# Altium PCB PCB1.PcbDoc (part 1 of 3)
Units mm, origin at the board's own origin, x right, y up, seen from the top; angles counter-clockwise.
Board outline 52.5 x 44.25 mm, 6 copper layers (Top Layer, Int1 (GND), Int2 (Sign), Int3 (Sign), Int4 (PWR), Bottom Layer), stack 1.551 mm thick; 69 components, 80 nets, 350 pads, 96 vias.
Unrouted connection lines stored in the file: 150.
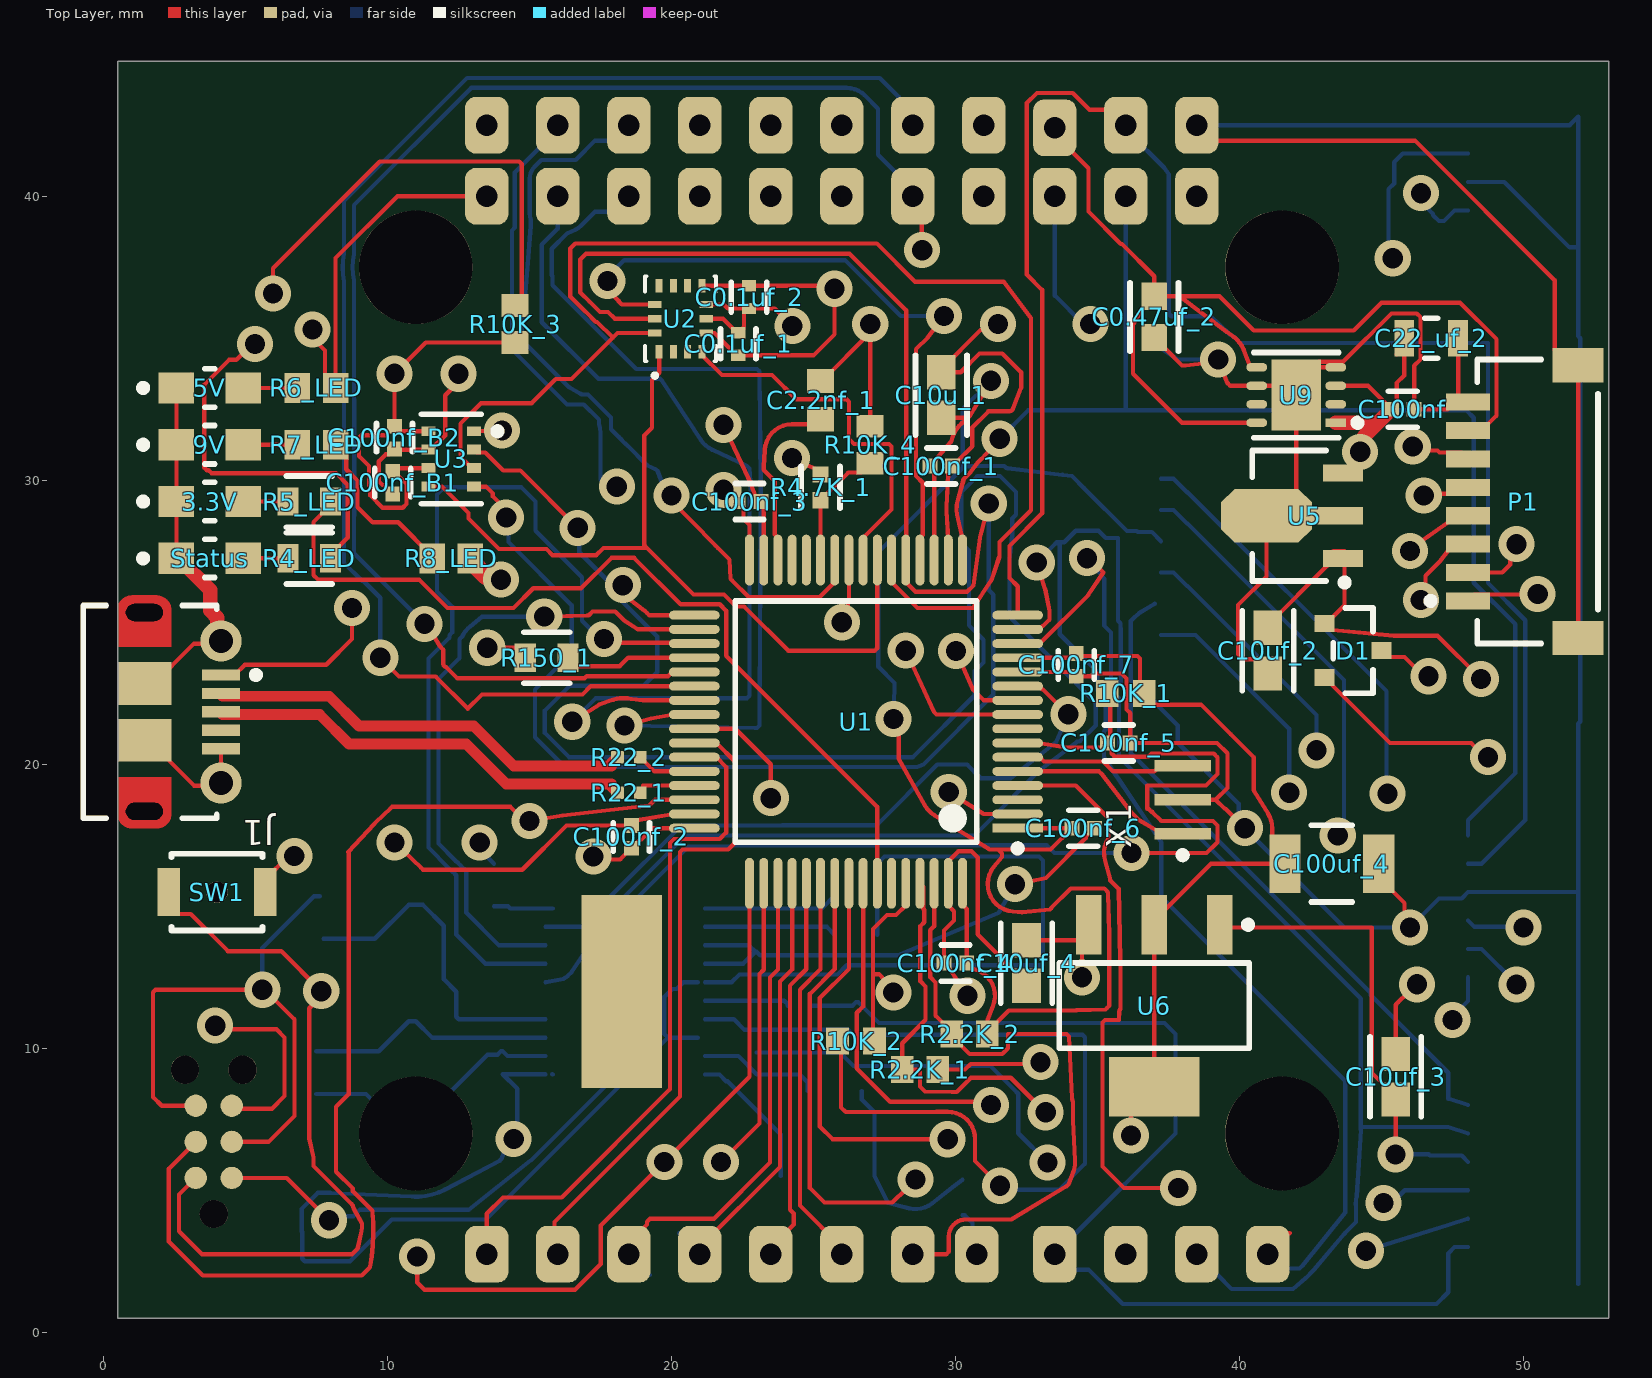
[diagram p0: Top Layer view]
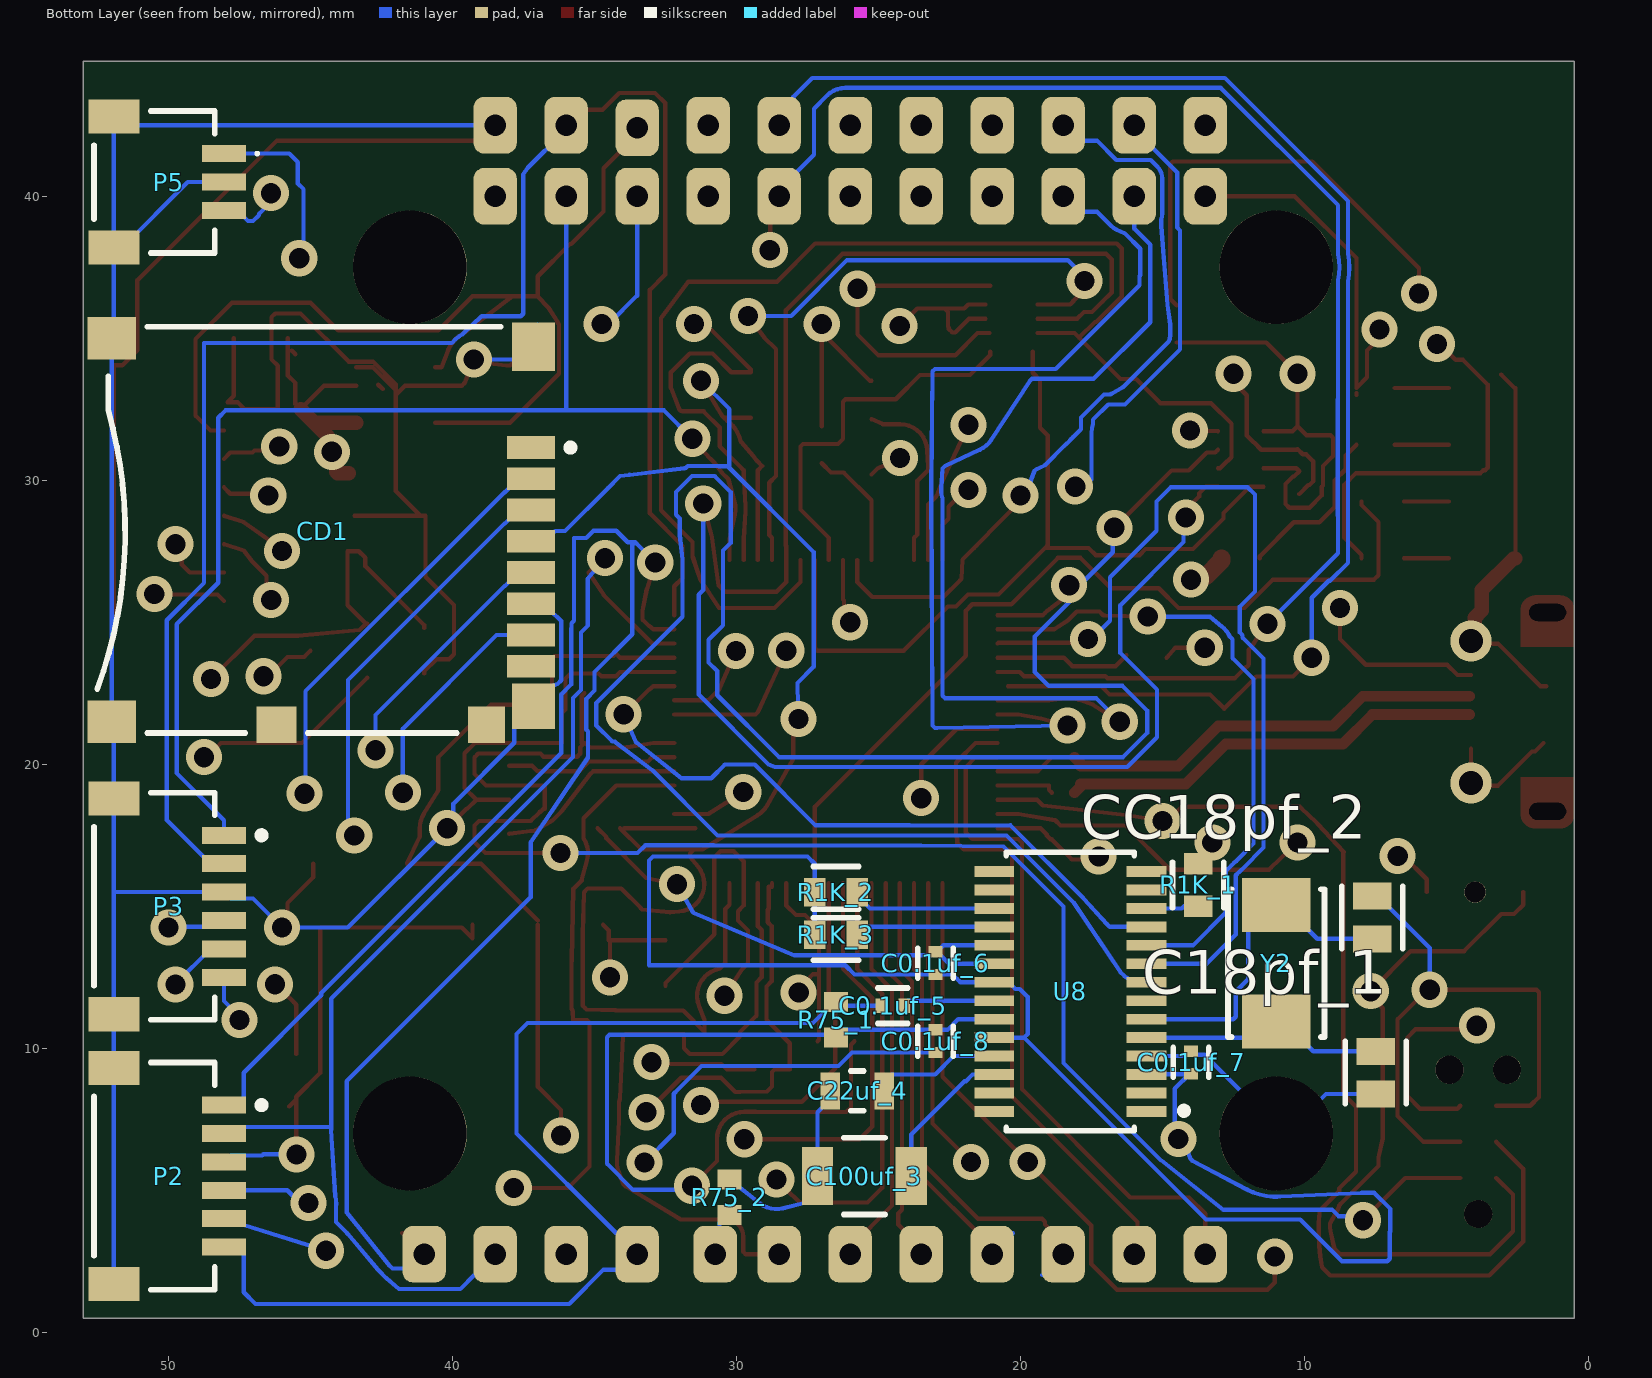
[diagram p1: Bottom Layer view, seen from below]
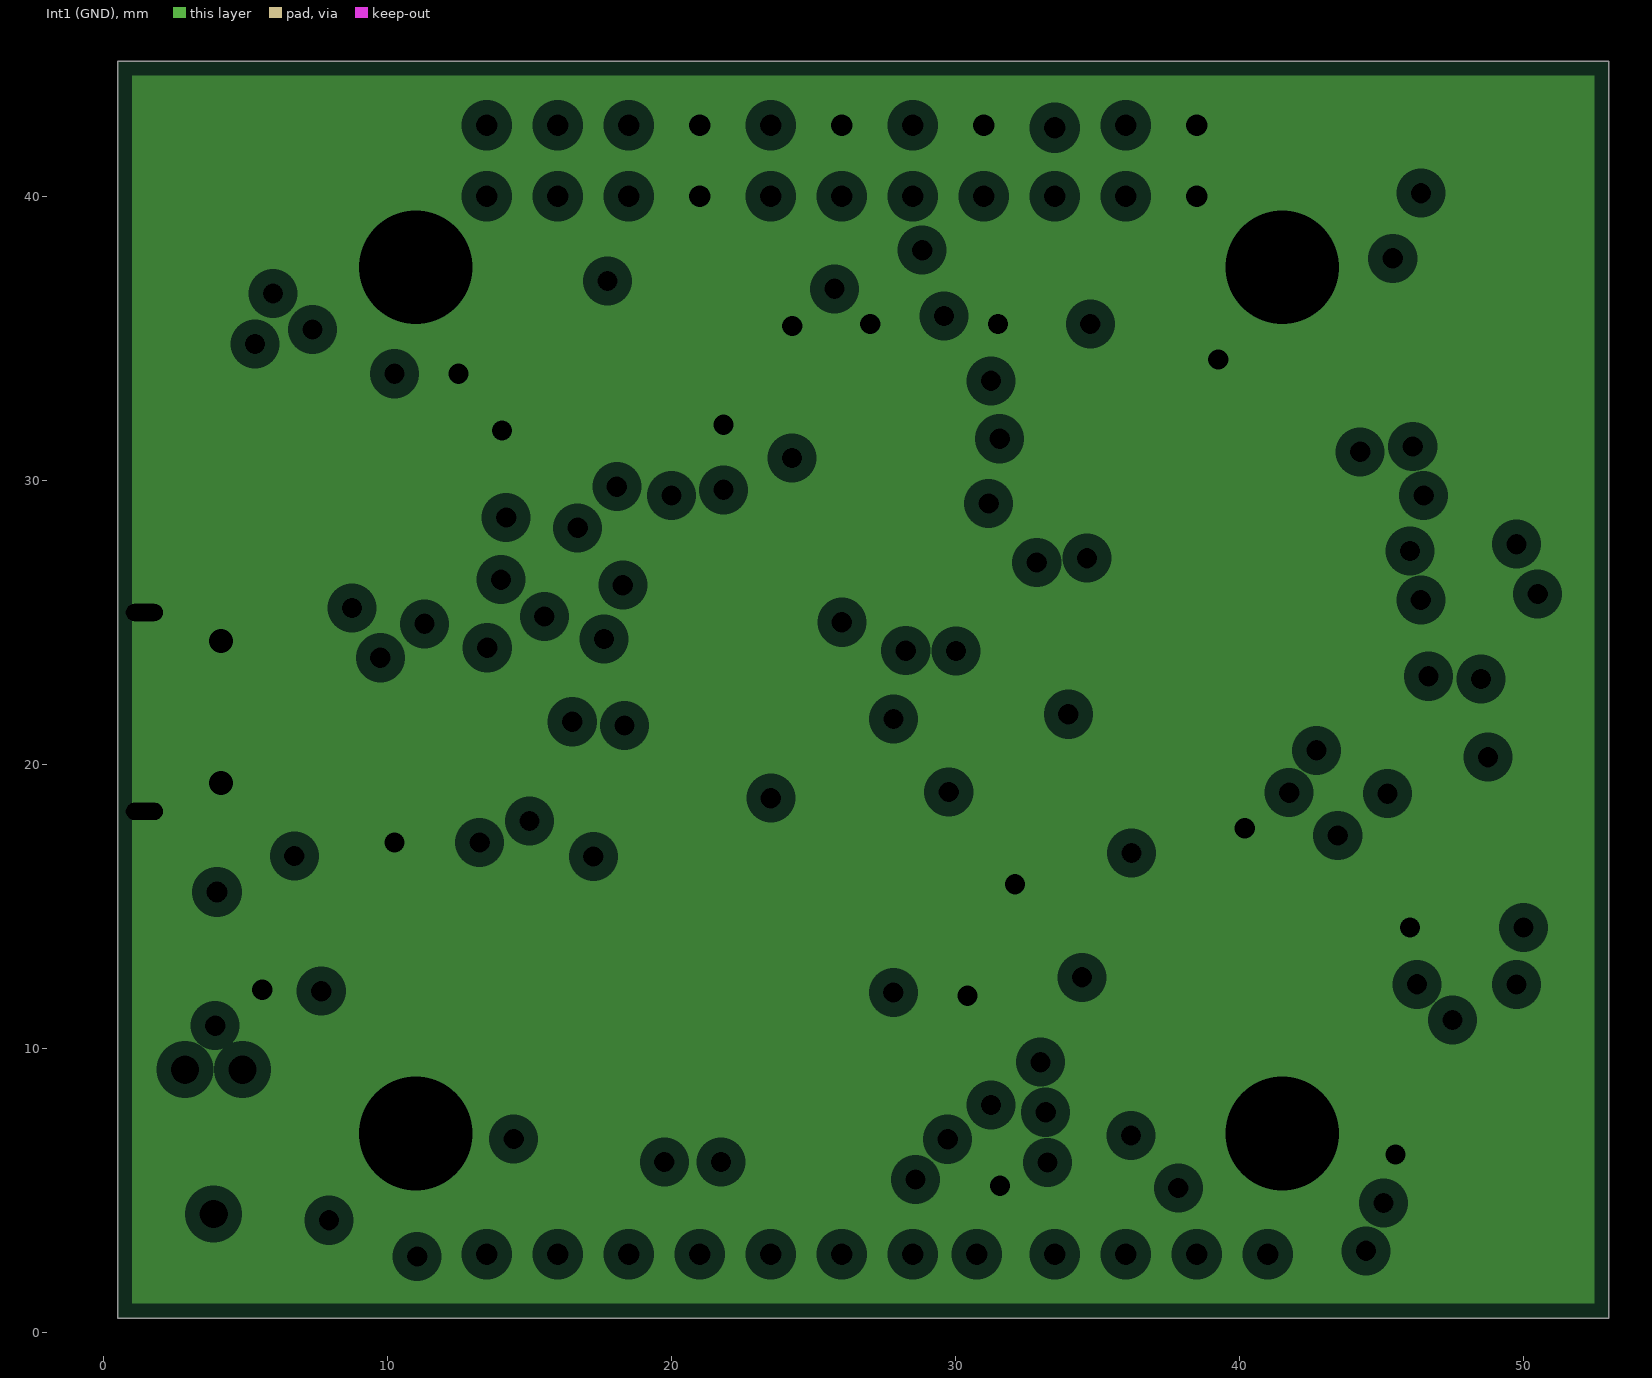
[diagram p2: Int1 (GND), clearances drawn from the general rule]
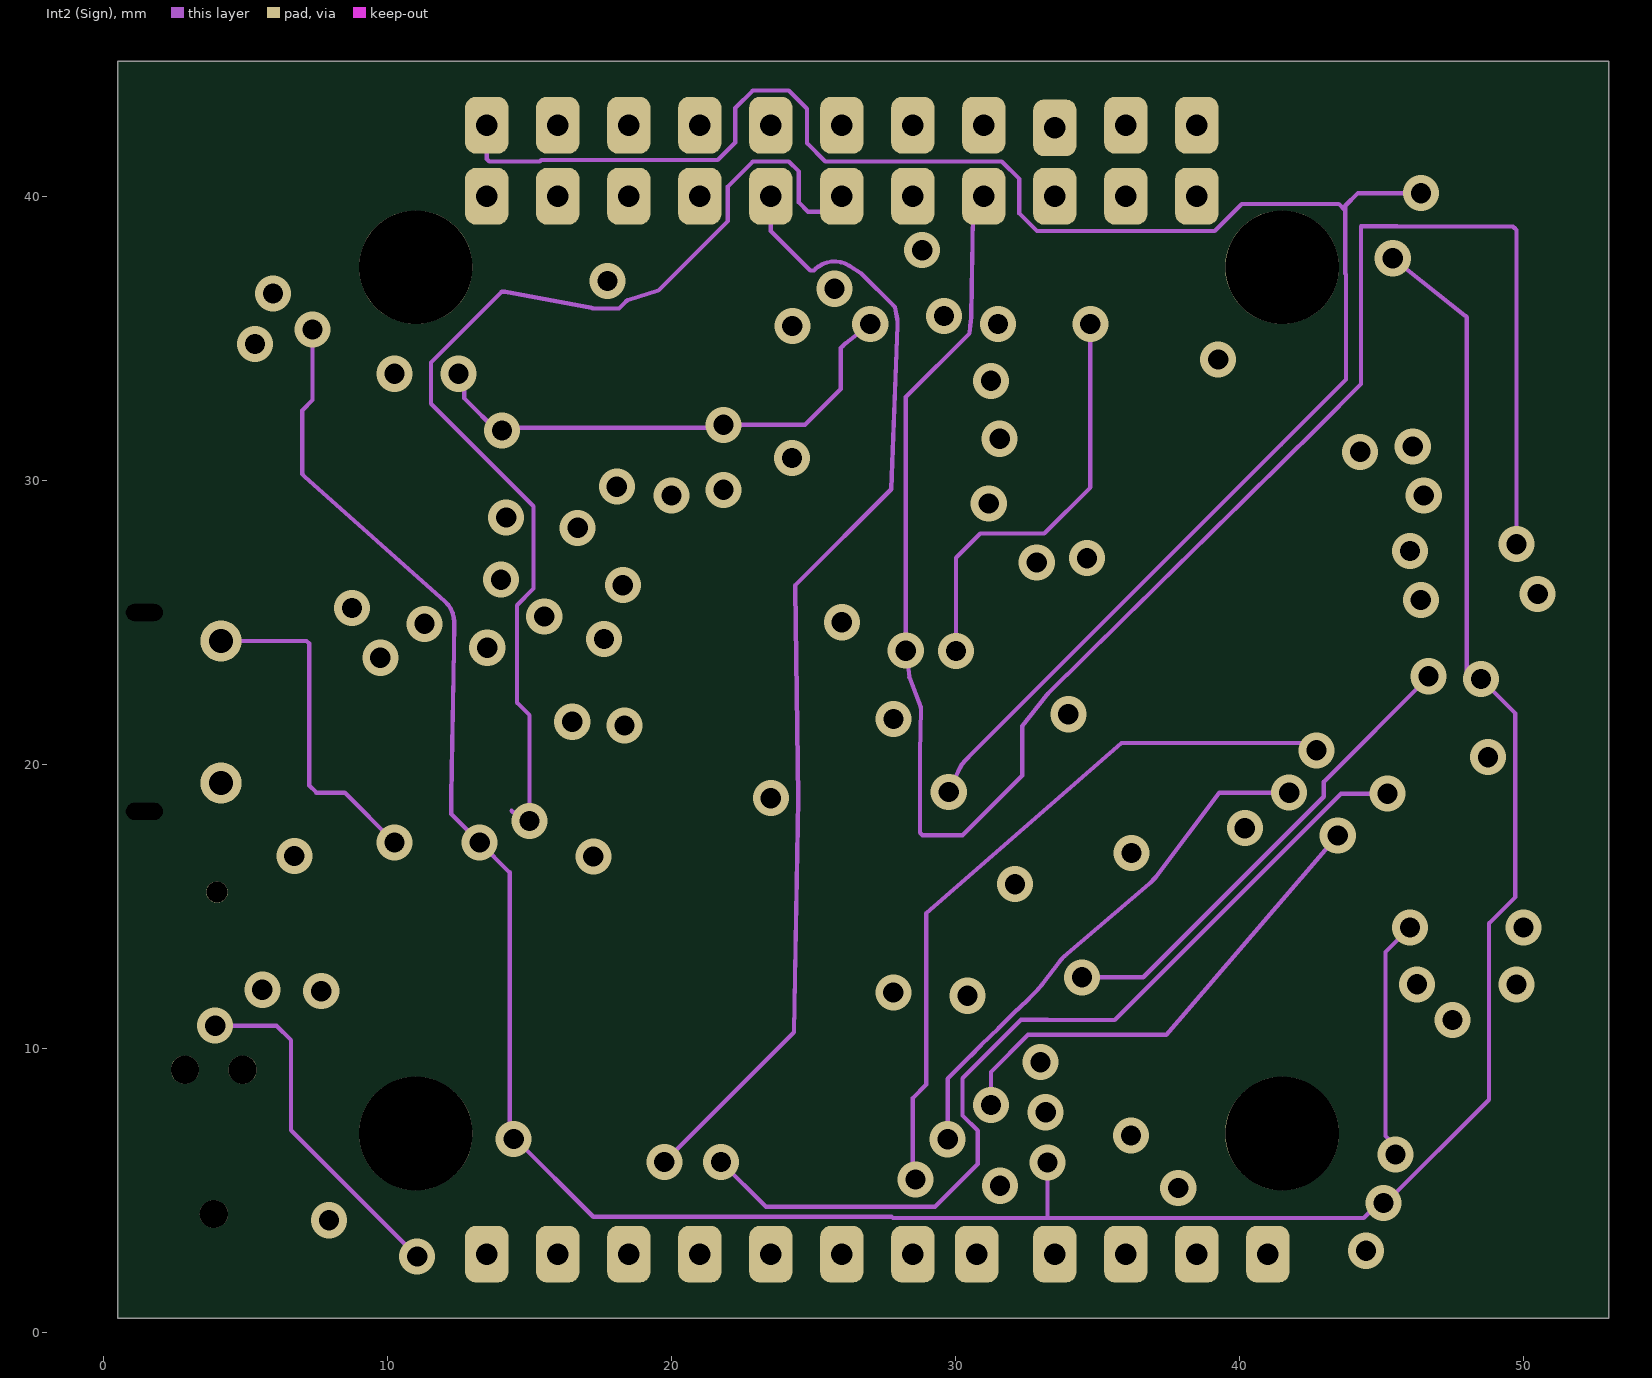
[diagram p3: Int2 (Sign)]
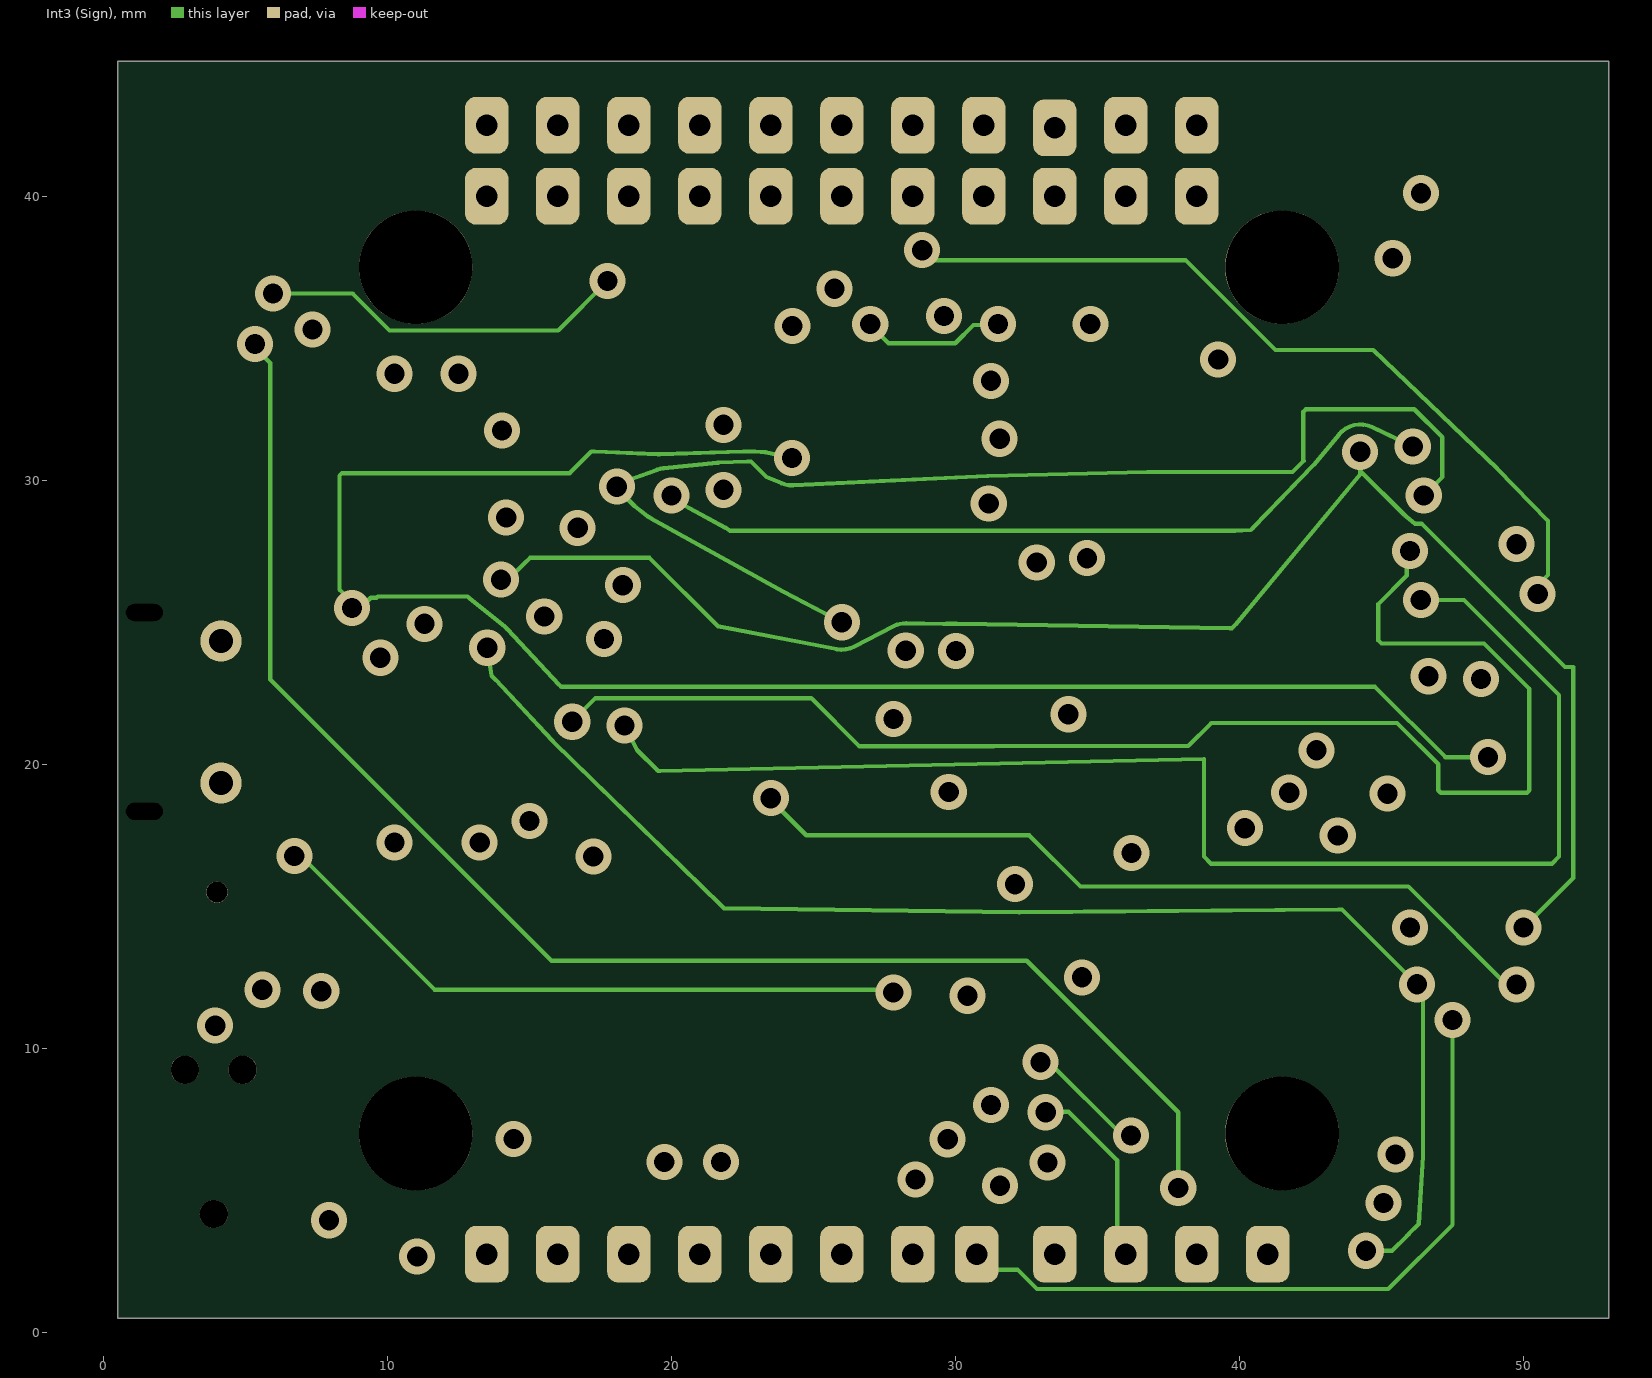
[diagram p4: Int3 (Sign)]
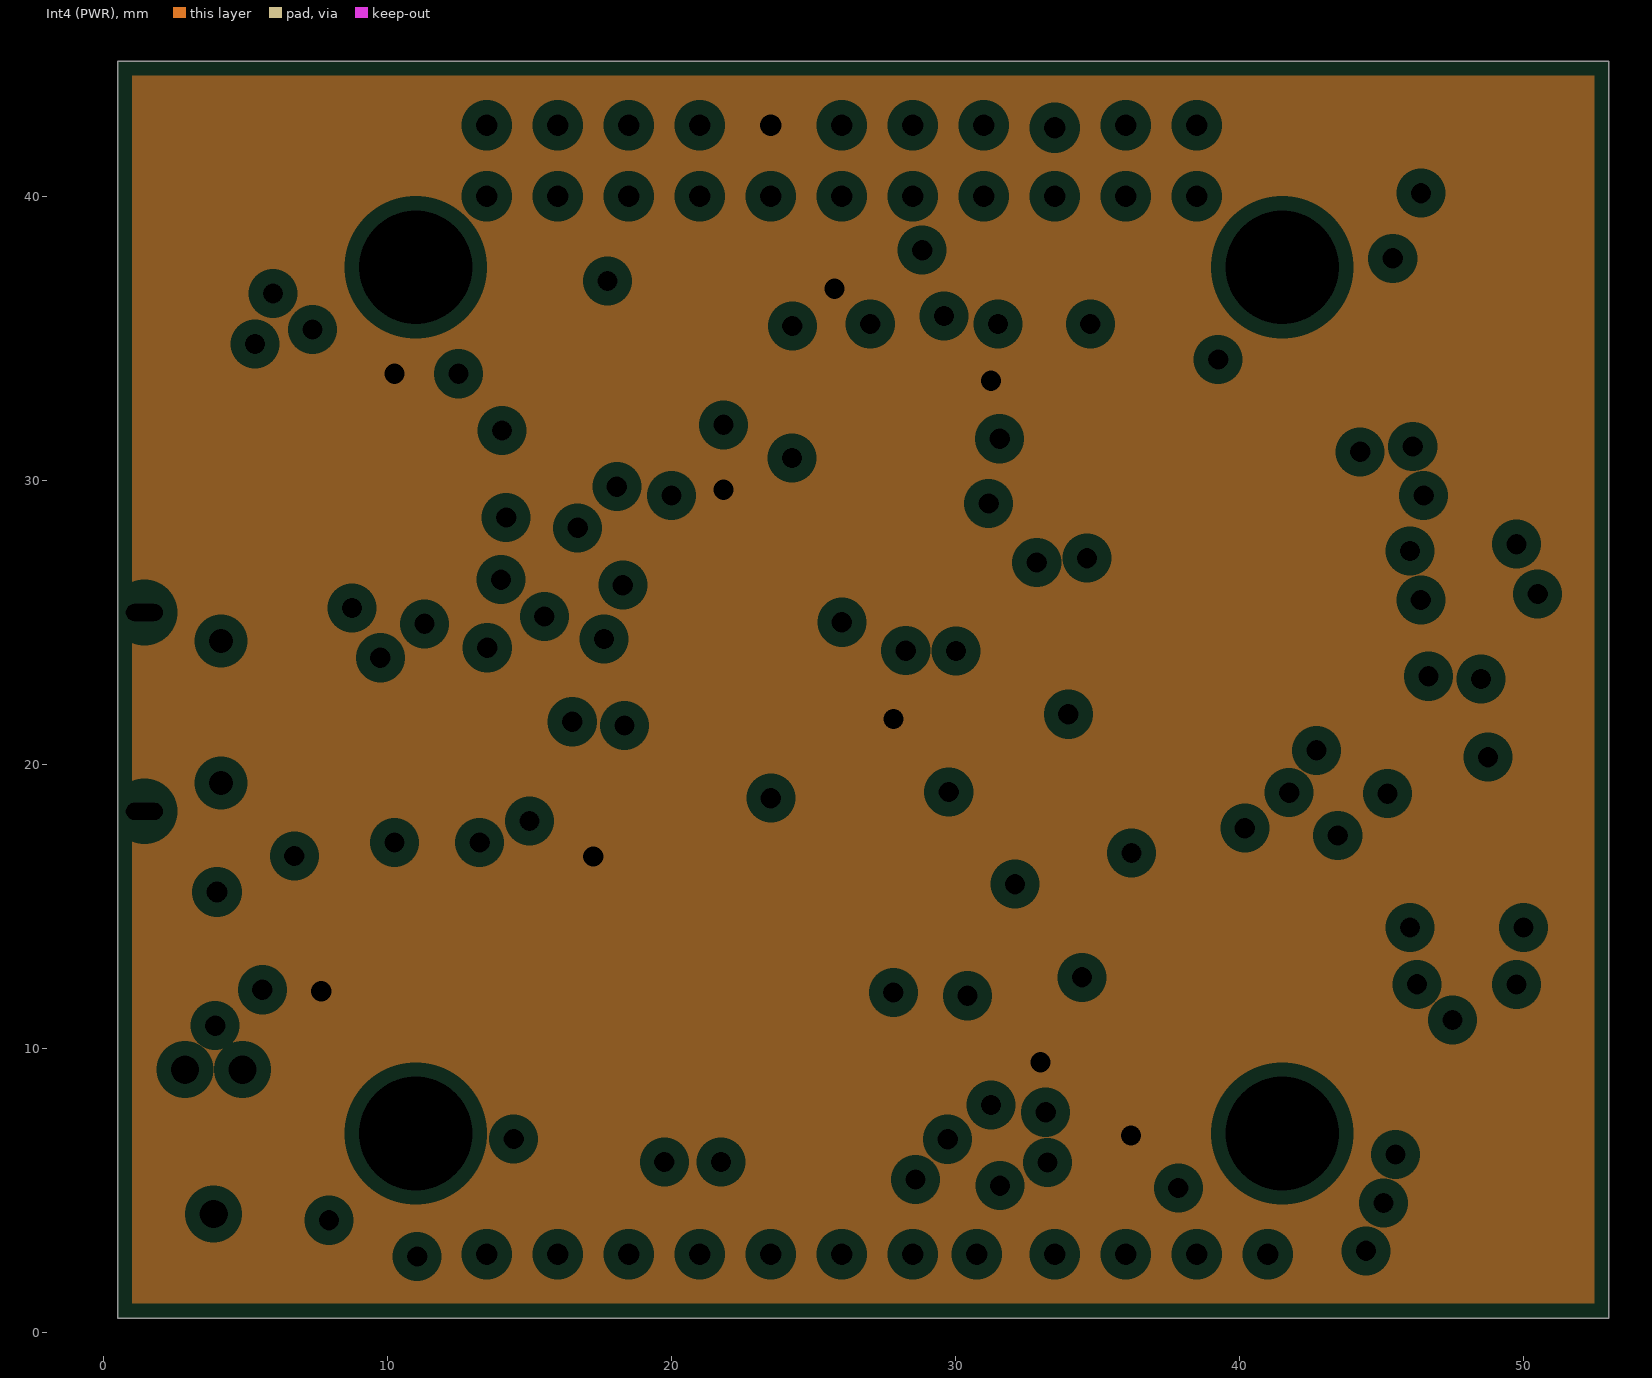
[diagram p5: Int4 (PWR), clearances drawn from the general rule]
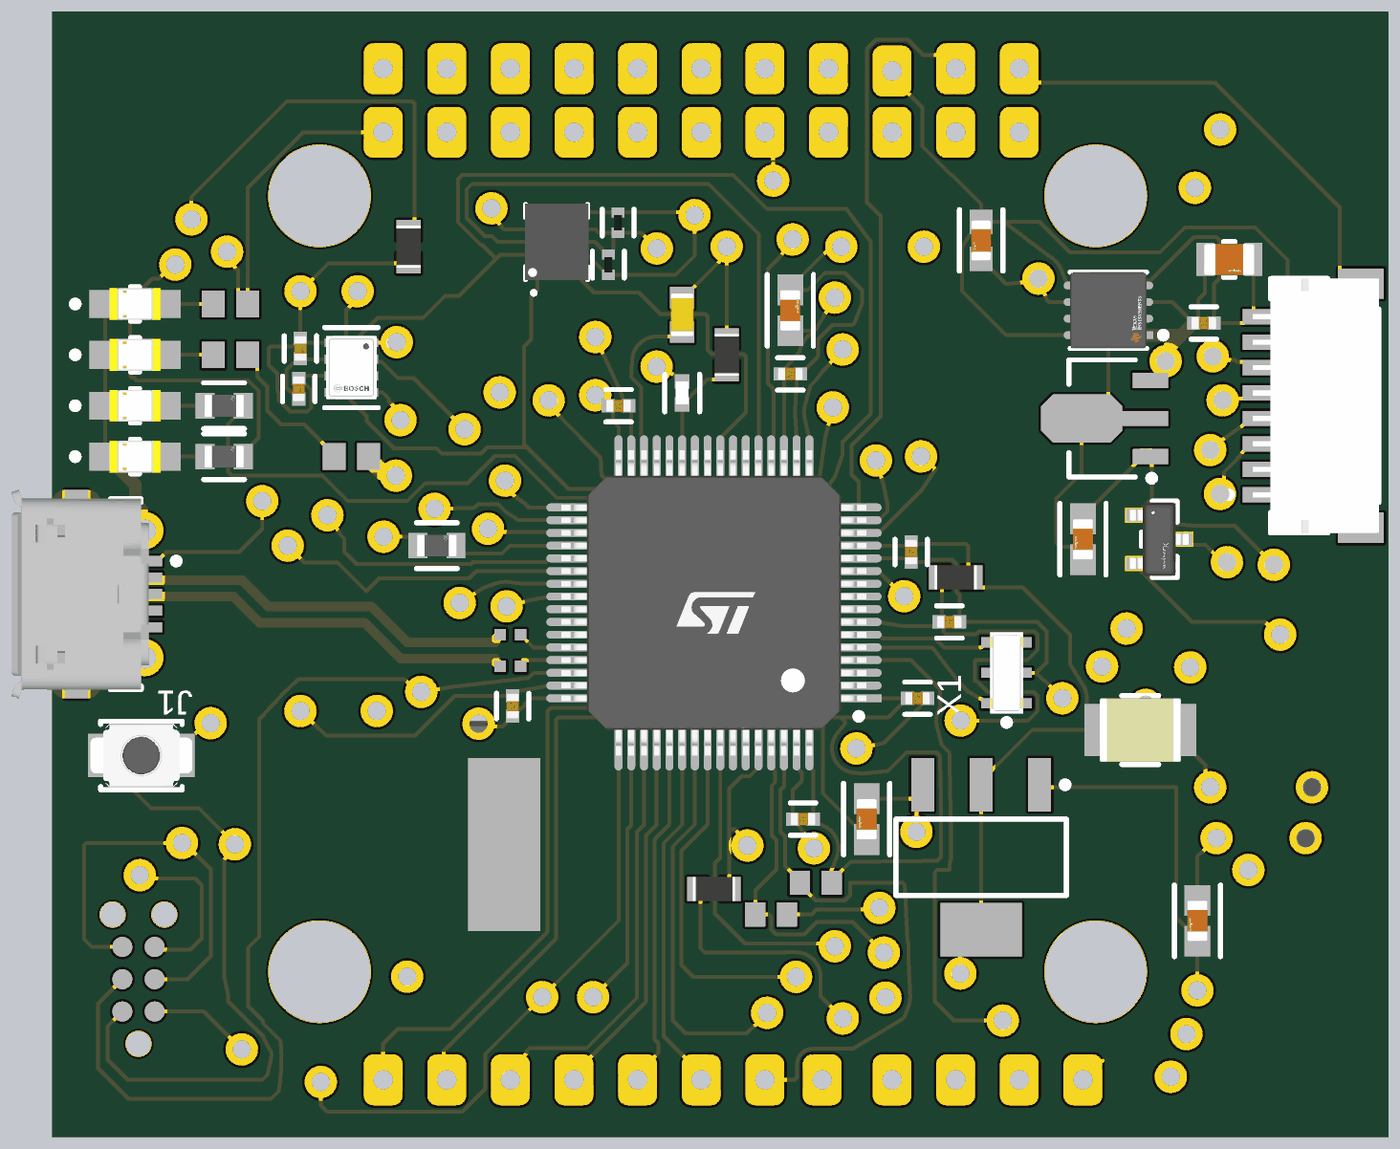
[diagram p7: 3D render of the assembled board from above, using the file's embedded part models]
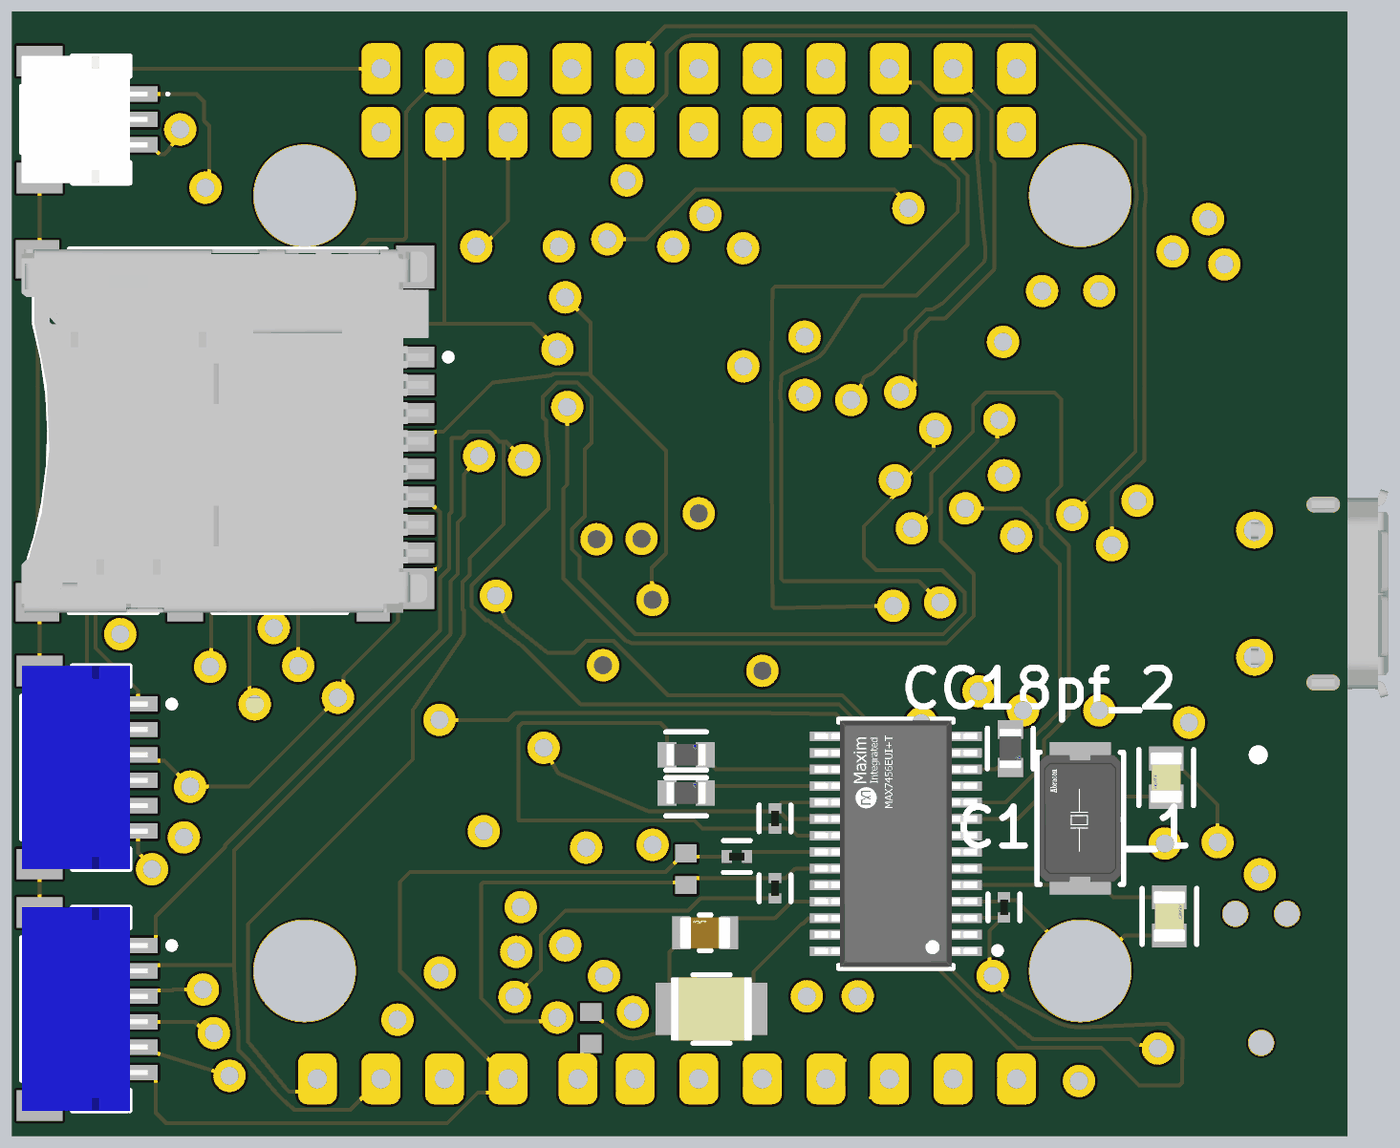
[diagram p8: 3D render of the assembled board from below, using the file's embedded part models]

## Layer stack, top to bottom
Top Solder: solder mask 0.0254, SM-001, Dk 4
Top Layer: signal copper 0.035
Dielectric 1: prepreg 0.0711, PP-006, Dk 4.1
Dielectric 2: prepreg 0.0711, PP-006, Dk 4.1
Int1 (GND): plane copper 0.035, net GND
Dielectric 3: core 0.4572, Core-035, Dk 4.7
Int2 (Sign): signal copper 0.035
Dielectric 4: prepreg 0.0711, PP-006, Dk 4.1
Dielectric 5: prepreg 0.0711, PP-006, Dk 4.1
Int3 (Sign): signal copper 0.035
Dielectric 6: core 0.4572, Core-035, Dk 4.7
Int4 (PWR): plane copper 0.035, net VDD
Dielectric 7: prepreg 0.0711, PP-006, Dk 4.1
Dielectric 8: prepreg 0.0711, PP-006, Dk 4.1
Bottom Layer: signal copper 0.035
Bottom Solder: solder mask 0.0254, SM-001, Dk 4

## Board outline
0.5,0.5 53,0.5 53,44.75 0.5,44.75

## Design rules (kind name [scope] priority, off if disabled: settings)
Clearance [All] p1: gap=0.15 ignorepadtopadclearanceinfootprint=FALSE except(0: Arc-Hole Track-Hole SMDPad-Hole THPad-Hole Via-Hole Fill-Hole Poly-Hole Region-Hole Text-Hole; 0.2: Arc-Arc Arc-Track Track-Track; 0.254: Arc-Via Track-Via SMDPad-Via THPad-Via; 0.5: Via-Via)
DiffPairsRouting [All] p1: maxlimit=0.254 minlimit=0.254 mostfreqgap=0.254 toplayer_minwidth=0.381 toplayer_maxwidth=0.381 toplayer_prefwidth=0.381 midlayer1_minwidth=0.381 midlayer1_maxwidth=0.381 midlayer1_prefwidth=0.381 midlayer2_minwidth=0.381 midlayer2_maxwidth=0.381 midlayer2_prefwidth=0.381 bottomlayer_minwidth=0.381 bottomlayer_maxwidth=0.381 bottomlayer_prefwidth=0.381 maxuncoupledlength=12.7
HoleSize [All] p1: absolutevalues=TRUE maxlimit=5 minlimit=0.025 maxpercent=80.000 minpercent=20.000
PlaneClearance [All] p1: clearance=0.508
PlaneConnect [All] p1: planeconnectstyle=Relief reliefexpansion=0.508 reliefentries=4 reliefconductorwidth=0.254 reliefairgap=0.254
PolygonConnect [All] p1: connectstyle=Direct reliefconductorwidth=0.254 reliefentries=4 polygonreliefangle="90 Angle" airgapwidth=0.254
RoutingVias [All] p1: holewidth=0.2 width=0.15 viastyle="Through Hole" minholewidth=0.2 minwidth=0.5 maxholewidth=5 maxwidth=6
SilkToSolderMaskClearance [IsPad] p1: minsilkscreentomaskgap=0.127 clearancetoexposedcopper=TRUE
SolderMaskExpansion [All] p1: expansion=0.102 istentingtop=FALSE
UnRoutedNet [All] p1: checkbadconnections=TRUE
Width [All] p1: maxlimit=1 minlimit=0.1 preferedwidth=0.15 minimp=50.000000 maximp=50.000000 favimp=50.000000
24 further rules are at their usual default settings.

## Classes and differential pairs
differential pair USB_DATA2: +USB_DATA2_P -USB_DATA2_N

## Components (designator, comment, footprint, x,y, rotation, side; value= is the part's Value field where it differs from the comment)
3.3V "SML-210MTT86" FP-SML-210-MFG 3.75,29.25 r0 top
5V "SML-210MTT86" FP-SML-210-MFG 3.75,33.25 r0 top
9V "SML-210MTT86" FP-SML-210-MFG 3.75,31.25 r0 top
C0.1uf_1 "GRM155R71C104KA88D" FP-GRM15-MFG 22.352,34.798 r90 top value=0.10μF
C0.1uf_2 "GRM155R71C104KA88D" FP-GRM15-MFG 22.733,36.449 r270 top value=0.10μF
C0.1uf_5 "GRM155R71C104KA88D" FP-GRM15-MFG 24.5,11.5 r180 bottom value=0.10μF
C0.1uf_6 "GRM155R71C104KA88D" FP-GRM15-MFG 23,13 r90 bottom value=0.10μF
C0.1uf_7 "GRM155R71C104KA88D" FP-GRM15-MFG 14,9.5 r90 bottom value=0.10μF
C0.1uf_8 "GRM155R71C104KA88D" FP-GRM15-MFG 23,10.25 r90 bottom value=0.10μF
C0.47uf_2 "GRM188R71C474KA88D" FP-GRM188-0_1-e0_2_0_5-IPC_B 37,35.75 r270 top
C2.2nf_1 "GRM188R71H222KA01D" CAPC1608X90X35NL10T15 25.25,32.825 r270 top
C10u_1 "GRM188R60J106ME47D" FP-GRM188-0_1-e0_2_0_55-IPC_A 29.5,33 r90 top
C10uf_2 "GRM188R60J106ME47D" FP-GRM188-0_1-e0_2_0_55-IPC_A 41,24 r270 top
C10uf_3 "GRM188R60J106ME47D" FP-GRM188-0_1-e0_2_0_55-IPC_A 45.5,9 r270 top
C10uf_4 "GRM188R60J106ME47D" FP-GRM188-0_1-e0_2_0_55-IPC_A 32.5,13 r270 top
C18pf_1 "C0805C180J5GACTU" FP-C0805C-DN-MFG 7.493,9.144 r270 bottom value="18 pF"
C22_uf_2 "GRM21BR60J226ME39L" FP-GRM21B-0_15-MFG 46.75,35 r0 top
C22uf_4 "GRM21BR60J226ME39L" FP-GRM21B-0_15-MFG 25.75,8.5 r0 bottom
C100nf "C0402C104K8PACTU" FP-C0402-BB-MFG 45.75,32.5 r0 top value="0.10 μF"
C100nf_1 "C0402C104K8PACTU" FP-C0402-BB-MFG 29.5,30.5 r0 top value="0.10 μF"
C100nf_2 "C0402C104K8PACTU" FP-C0402-BB-MFG 18.592,17.443 r90 top value="0.10 μF"
C100nf_3 "C0402C104K8PACTU" FP-C0402-BB-MFG 22.75,29.25 r0 top value="0.10 μF"
C100nf_4 "C0402C104K8PACTU" FP-C0402-BB-MFG 30,13 r180 top value="0.10 μF"
C100nf_5 "C0402C104K8PACTU" FP-C0402-BB-MFG 35.75,20.75 r0 top value="0.10 μF"
C100nf_6 "C0402C104K8PACTU" FP-C0402-BB-MFG 34.5,17.75 r0 top value="0.10 μF"
C100nf_7 "C0402C104K8PACTU" FP-C0402-BB-MFG 34.25,23.5 r270 top value="0.10 μF"
C100nf_B1 "C0402C104K8PACTU" FP-C0402-BB-MFG 10.185,29.915 r270 top value="0.10 μF"
C100nf_B2 "C0402C104K8PACTU" FP-C0402-BB-MFG 10.25,31.5 r270 top value="0.10 μF"
C100uf_3 "GRM32ER60J107ME20L" FP-GRM32-0_3-MFG 25.5,5.5 r0 bottom value=100uF
C100uf_4 "GRM32ER60J107ME20L" FP-GRM32-0_3-MFG 43.25,16.5 r0 top value=100uF
CC18pf_2 "C0805C180J5GACTU" FP-C0805C-DN-MFG 7.62,14.605 r90 bottom value="18 pF"
CD1 "502774-0891" MOLX-502774-0891_V 44.625,28.25 r270 bottom
D1 "BAT54C,215" FP-SOT23-MFG 44,24 r0 top value=10pF
J1 "105017-0001" USB-MICRO-B_V 2.794,21.844 r270 top
P1 "SM08B-SRSS-TB(LF)(SN)" JST-SM08B-SRSS-TB_V 50.5,29.25 r90 top
P2 "SM06B-SRSS-TB(LF)(SN)" JST-SM06B-SRSS-TB_V 50.5,5.5 r270 bottom
P3 "SM06B-SRSS-TB(LF)(SN)" JST-SM06B-SRSS-TB_V 50.5,15 r270 bottom
P5 "SM03B-SRSS-TB(LF)(SN)" JST-SM03B-SRSS-TB_V 50.5,40.5 r270 bottom
R1K_1 "CRCW06031K00FKEA" FP-CRCW0603-e3-MFG 13.75,15.75 r270 bottom
R1K_2 "CRCW06031K00FKEA" FP-CRCW0603-e3-MFG 26.5,15.5 r180 bottom
R1K_3 "CRCW06031K00FKEA" FP-CRCW0603-e3-MFG 26.5,14 r180 bottom
R2.2K_1 "CRCW06032K20FKEA" RESC1609X50X30NL10T20 28.75,9.25 r0 top
R2.2K_2 "CRCW06032K20FKEA" RESC1609X50X30NL10T20 30.5,10.5 r0 top
R4.7K_1 "CRCW04024K70FKED" FP-CRCW0402-e3-IPC_B 25.25,29.75 r270 top
R4_LED "CRCW06031K00FKEA" FP-CRCW0603-e3-MFG 7.25,27.25 r0 top
R5_LED "CRCW06031K00FKEA" FP-CRCW0603-e3-MFG 7.25,29.25 r0 top
R6_LED "CRCW06032K00FKEA" RESC1609X50X30ML10T20 7.5,33.25 r0 top
R7_LED "CRCW06032K00FKEA" RESC1609X50X30ML10T20 7.5,31.25 r0 top
R8_LED "CRCW06032K00FKEA" RESC1609X50X30ML10T20 12.25,27.25 r0 top
R10K_1 "CRCW060310K0FKEA" RESC1609X50X30NL8T20 36,22.5 r0 top
R10K_2 "CRCW060310K0FKEA" RESC1609X50X30NL8T20 26.5,10.25 r0 top
R10K_3 "CRCW060310K0FKEA" RESC1609X50X30NL8T20 14.5,35.5 r90 top
R10K_4 "CRCW060310K0FKEA" RESC1609X50X30NL8T20 27,31.25 r270 top
R22_1 "CRCW040222R0FKED" RESC1005X40X25LL05T05 18.5,19 r0 top
R22_2 "CRCW040222R0FKED" RESC1005X40X25LL05T05 18.5,20.25 r0 top
R75_1 "ERJ-3EKF75R0V" RESC1608X55X30LL15T15 26.5,11 r90 bottom
R75_2 "ERJ-3EKF75R0V" RESC1608X55X30LL15T15 30.25,4.75 r90 bottom
R150_1 "CRCW0603150RFKEA" FP-CRCW0603-e3-MFG 15.609,23.75 r0 top
Status "SML-210MTT86" FP-SML-210-MFG 3.75,27.25 r0 top
SW1 "B3U-1000P-B" FP-B3U-1000P-B-MFG 4,15.5 r180 top
U1 "STM32F722RET6" FP-LQFP64-5W-IPC_A 26.5,21.5 r180 top
U2 "BMI270" XDCR_BMI270 20.32,35.687 r90 top
U3 "BMP280" FP-BMP280-MFG 12.25,30.75 r0 top
U5 "UA78L05CPK" SOT-89_N 41.75,28.75 r180 top
U6 "LD1117S33TR" SOT-223_L 37,11.5 r270 top
U8 "MAX7456EUI+T" FP-U28E-5-MFG 18.25,12 r0 bottom
U9 "TLV76790QWDRBRQ1" FP-DRB0008J-IPC_C 42,33 r180 top
X1 "CSTCE8M00G55-R0" MURA-CSTCE_G_A-3_V 38,18.75 r90 top
Y2 "ABM3-27.000MHZ-D2Y-T" FP-ABM3-MFG 11,13 r90 bottom

## Footprints (in the part's own frame and the unit in brackets; to place one, negate y for a bottom-side part, rotate by r counter-clockwise, add the part's x,y. Pads: shape width x height; smd on the part's side, far side on the other; paste and mask are expansions set on the pad)
CAPC1608X90X35NL10T15 [mm] "Chip Capacitor, 2-Leads, Body 1.7x0.9mm, IPC Medium Density"
  rect 0.85x0.95 smd: 1(-0.675,0) 2(0.675,0)
  body extent -0.85,-0.45 0.85,0.45, height 0.9
FP-ABM3-MFG [mm]
  rect 1.9x2.4 smd paste+0 mask+0: 1(-2.05,0) 2(2.05,0)
  silkscreen extent -2.6,-1.7 2.6,1.7, body extent -2.5,-1.6 2.5,1.6, height 1.3
FP-B3U-1000P-B-MFG [mm]
  rect 0.8x1.7 smd paste+0 mask+0: 1(-1.7,0) 2(1.7,0)
  round 0.75 hole 0.75 unplated paste-1000 mask+0: ""(0,0)
  silkscreen extent -1.6,-1.35 1.6,1.35, body extent -2.2,-1.45 2.2,1.45, height 0.25
FP-BMP280-MFG [mm]
  rect 0.5x0.35 smd paste+0 mask+0: 1(0.8,0.975) 2(0.8,0.325) 3(0.8,-0.325) 4(0.8,-0.975) 5(-0.8,-0.975) 6(-0.8,-0.325) 7(-0.8,0.325) 8(-0.8,0.975)
  silkscreen extent -1.05,-1.57 1.75,1.57, body extent -1.55,-1.8 1.55,1.8, height 0.25
FP-C0402-BB-MFG [mm]
  rect 0.52x0.52 smd paste+0 mask+0: 1(-0.4,0) 2(0.4,0)
  silkscreen extent -0.5,-0.64 0.5,0.63, body extent -0.8,-0.4 0.8,0.4, height 0.25
FP-C0805C-DN-MFG [mm]
  rect 0.95x1.35 smd paste+0 mask+0: 1(-0.75,0) 2(0.75,0)
  silkscreen extent -1.1,-1.07 1.1,1.07, body extent -1,-0.63 1,0.63, height 0.88
FP-CRCW0402-e3-IPC_B [mm]
  rect 0.568x0.572 smd paste+0 mask+0: 1(-0.452,0) 2(0.452,0)
  silkscreen extent -0.74,-0.69 0.74,0.69, body extent -0.5,-0.25 0.5,0.25, height 0.4
FP-CRCW0603-e3-MFG [mm]
  rect 0.75x1 smd paste+0 mask+0: 1(-0.75,0) 2(0.75,0)
  silkscreen extent -0.8,-0.9 0.8,0.9, body extent -0.77,-0.43 0.77,0.43, height 0.5
FP-DRB0008J-IPC_C [mm]
  rect 0.731x0.302 smd paste+0 mask+0: 1(-1.391,0.975)
  rrect100% 0.731x0.302 smd paste+0 mask+0: 2(-1.391,0.325) 3(-1.391,-0.325) 4(-1.391,-0.975) 5(1.39,-0.975) 6(1.39,-0.325) 7(1.39,0.325) 8(1.39,0.975)
  rect 1.75x2.5 smd paste-1000 mask+0: 9(0,0)
  silkscreen extent -2.28,-1.5 1.5,1.5, body extent -1.86,-1.6 1.86,1.6, height 0.25
FP-GRM15-MFG [mm]
  rect 0.4x0.5 smd paste+0 mask+0: 1(-0.4,0) 2(0.4,0)
  silkscreen extent -0.52,-0.63 0.53,0.63, body extent -0.7,-0.38 0.7,0.38, height 0.25
FP-GRM21B-0_15-MFG [mm]
  rect 0.7x1.3 smd paste+0 mask+0: 1(-0.95,0) 2(0.95,0)
  silkscreen extent -0.22,-0.7 0.22,0.7, body extent -1.4,-0.8 1.4,0.8, height 0.25
FP-GRM32-0_3-MFG [mm]
  rect 1.1x2.05 smd paste+0 mask+0: 1(-1.65,0) 2(1.65,0)
  silkscreen extent -0.73,-1.35 0.72,1.35, body extent -1.6,-1.25 1.6,1.25, height 2.7
FP-GRM188-0_1-e0_2_0_5-IPC_B [mm]
  rect 0.959x0.912 smd paste+0 mask+0: 1(-0.727,0) 2(0.727,0)
  silkscreen extent -1.21,-0.86 1.21,0.86, body extent -1.46,-0.71 1.46,0.71, height 0.25
FP-GRM188-0_1-e0_2_0_55-IPC_A [mm]
  rect 1.208x1.012 smd paste+0 mask+0: 1(-0.802,0) 2(0.802,0)
  silkscreen extent -1.41,-0.91 1.41,0.91, body extent -1.91,-1.01 1.91,1.01, height 0.25
FP-LQFP64-5W-IPC_A [mm]
  rect 1.788x0.312 smd paste+0 mask+0: 1(-5.691,3.75)
  rrect100% 1.788x0.312 smd paste+0 mask+0: 2(-5.691,3.25) 3(-5.691,2.75) 4(-5.691,2.25) 5(-5.691,1.75) 6(-5.691,1.25) 7(-5.691,0.75) 8(-5.691,0.25) 9(-5.691,-0.25) 10(-5.691,-0.75) 11(-5.691,-1.25) 12(-5.691,-1.75) 13(-5.691,-2.25) 14(-5.691,-2.75) 15(-5.691,-3.25) 16(-5.691,-3.75) 33(5.691,-3.75) 34(5.691,-3.25) 35(5.691,-2.75) 36(5.691,-2.25) 37(5.691,-1.75) 38(5.691,-1.25) 39(5.691,-0.75) 40(5.691,-0.25) 41(5.691,0.25) 42(5.691,0.75) 43(5.691,1.25) 44(5.691,1.75) 45(5.691,2.25) 46(5.691,2.75) 47(5.691,3.25) 48(5.691,3.75)
  rrect100% 0.312x1.788 smd paste+0 mask+0: 17(-3.75,-5.691) 18(-3.25,-5.691) 19(-2.75,-5.691) 20(-2.25,-5.691) 21(-1.75,-5.691) 22(-1.25,-5.691) 23(-0.75,-5.691) 24(-0.25,-5.691) 25(0.25,-5.691) 26(0.75,-5.691) 27(1.25,-5.691) 28(1.75,-5.691) 29(2.25,-5.691) 30(2.75,-5.691) 31(3.25,-5.691) 32(3.75,-5.691) 49(3.75,5.691) 50(3.25,5.691) 51(2.75,5.691) 52(2.25,5.691) 53(1.75,5.691) 54(1.25,5.691) 55(0.75,5.691) 56(0.25,5.691) 57(-0.25,5.691) 58(-0.75,5.691) 59(-1.25,5.691) 60(-1.75,5.691) 61(-2.25,5.691) 62(-2.75,5.691) 63(-3.25,5.691) 64(-3.75,5.691)
  silkscreen extent -5.82,-4.25 4.25,4.58, body extent -7.09,-7.09 7.09,7.09, height 0.25
FP-SML-210-MFG [mm]
  rect 1.25x1.1 smd paste+0 mask+0: 1(-1.175,0) 2(1.175,0)
  silkscreen extent -2.47,-0.68 0.17,0.67, body extent -1.9,-0.77 1.9,0.77, height 0.25
FP-SOT23-MFG [mm]
  rect 0.7x0.6 smd paste-1000 mask+0: 1(-1,0.95) 2(-1,-0.95) 3(1,0)
  silkscreen extent -0.7,-1.5 0.7,1.5, body extent -1.5,-1.65 1.5,1.65, height 0.25
FP-U28E-5-MFG [mm]
  rect 1.4x0.38 smd paste+0 mask+0: 1(-2.68,4.225) 2(-2.68,3.575) 3(-2.68,2.925) 4(-2.68,2.275) 5(-2.68,1.625) 6(-2.68,0.975) 7(-2.68,0.325) 8(-2.68,-0.325) 9(-2.68,-0.975) 10(-2.68,-1.625) 11(-2.68,-2.275) 12(-2.68,-2.925) 13(-2.68,-3.575) 14(-2.68,-4.225) 15(2.68,-4.225) 16(2.68,-3.575) 17(2.68,-2.925) 18(2.68,-2.275) 19(2.68,-1.625) 20(2.68,-0.975) 21(2.68,-0.325) 22(2.68,0.325) 23(2.68,0.975) 24(2.68,1.625) 25(2.68,2.275) 26(2.68,2.925) 27(2.68,3.575) 28(2.68,4.225)
  rect 2.84x6.8 smd far side paste+0 mask+0: 23(0,0)
  silkscreen extent -4.12,-4.9 2.25,4.9, body extent -3.2,-4.85 3.2,4.85, height 1.1
JST-SM03B-SRSS-TB_V [mm] "SMD, 3-Leads, Body 5x4.25mm, Pitch 1mm"
  rect 0.6x1.55 smd: 1(-1,2.45) 2(0,2.45) 3(1,2.45)
  rect 1.2x1.8 smd: MP1(-2.3,-1.425) MP2(2.3,-1.425)
  silkscreen extent -2.5,-2.13 2.5,3.67, body extent -2.5,-2.13 2.5,2.82, height 3.25
JST-SM06B-SRSS-TB_V [mm] "SMD, 6-Leads, Body 8x4.25mm, Pitch 1mm"
  rect 0.6x1.55 smd: 1(-2.5,2.45) 2(-1.5,2.45) 3(-0.5,2.45) 4(0.5,2.45) 5(1.5,2.45) 6(2.5,2.45)
  rect 1.2x1.8 smd: MP1(-3.8,-1.425) MP2(3.8,-1.425)
  silkscreen extent -4,-2.13 4,3.9, body extent -4,-2.12 4,2.83, height 2.96
JST-SM08B-SRSS-TB_V [mm] "SMD, 8-Leads, Body 10x4.25mm, Pitch 1mm"
  rect 0.6x1.55 smd: 1(-3.5,2.45) 2(-2.5,2.45) 3(-1.5,2.45) 4(-0.5,2.45) 5(0.5,2.45) 6(1.5,2.45) 7(2.5,2.45) 8(3.5,2.45)
  rect 1.2x1.8 smd: MP1(-4.8,-1.425) MP2(4.8,-1.425)
  silkscreen extent -5,-2.13 5,3.9, body extent -5,-2.12 5,2.83, height 2.96
MOLX-502774-0891_V [mm] "SMD, 14-Leads, Body 15x14.3mm, Pitch 1.1mm"
  rect 0.8x1.68 smd: 1(-2.9,7.385) 2(-1.8,7.385) 3(-0.7,7.385) 4(0.4,7.385) 5(1.5,7.385) 6(2.6,7.385) 7(3.7,7.385) 8(4.8,7.385)
  rect 1.29x1.3 smd: 9(6.855,5.825)
  rect 1.29x1.4 smd: 10(6.855,-1.575)
  rect 1.5x1.7 smd: 11(6.75,-7.375) 12(-6.75,-7.375)
  rect 1.7x1.5 smd: 13(-6.45,7.475)
  rect 1.6x1.5 smd: 14(6.21,7.475)
  silkscreen extent -7.15,-7.88 7.15,8.9, body extent -7.15,-8 7.15,8, height 1.78
MURA-CSTCE_G_A-3_V [mm] "SMD, 3-Leads, Body 3.2x1.3mm, Pitch 1.2mm"
  rect 0.4x2 smd: 1(-1.2,0) 2(0,0) 3(1.2,0)
  silkscreen extent -2.07,-0.13 -1.83,0.12, body extent -1.6,-0.65 1.6,0.65, height 0.7
RESC1005X40X25LL05T05 [mm] "Chip Resistor, 2-Leads, Body 1.00x0.50mm, IPC High Density"
  rect 0.45x0.45 smd: 1(-0.4,0) 2(0.4,0)
  body extent -0.53,-0.27 0.53,0.28, height 0.4
RESC1608X55X30LL15T15 [mm] "Chip Resistor, 2-Leads, Body 1.60x0.80mm, IPC High Density"
  rect 0.7x0.85 smd: 1(-0.625,0) 2(0.625,0)
  body extent -0.87,-0.48 0.87,0.48, height 0.55
RESC1609X50X30ML10T20 [mm] "Chip Resistor, 2-Leads, Body 1.55x0.85mm, IPC Low Density"
  rect 0.9x1.05 smd: 1(-0.675,0) 2(0.675,0)
  body extent -0.82,-0.48 0.82,0.48, height 0.5
RESC1609X50X30NL8T20 [mm] "Chip Resistor, 2-Leads, Body 1.65x0.95mm, IPC Medium Density"
  rect 0.8x0.95 smd: 1(-0.65,0) 2(0.65,0)
  body extent -0.82,-0.48 0.82,0.48, height 0.5
RESC1609X50X30NL10T20 [mm] "Chip Resistor, 2-Leads, Body 1.55x0.85mm, IPC Medium Density"
  rect 0.8x0.95 smd: 1(-0.625,0) 2(0.625,0)
  body extent -0.82,-0.48 0.82,0.48, height 0.5
SOT-89_N [mm] "SOT89, 3-Leads, Body 4.5x2.4 mm, Pitch 1.5mm, Lead Span 4.1mm, IPC Medium Density"
  rect 1.4x0.6 smd: 1(-1.9,1.5) 3(-1.9,-1.5)
  rect 1.8x0.6 smd: 2(-1.7,0)
  oct 3.2x1.9 smd: 2(0.8,0)
  silkscreen extent -2.08,-2.3 1.3,2.47, body extent -1.3,-2.3 1.3,2.3, height 1.6
SOT-223_L [mm] "SOT223, 4-Leads, Body 6.5x3.5mm, Pitch 2.3mm, Lead Span 7mm, IPC High Density"
  rect 2.1x0.9 smd: 1(-2.85,2.3) 2(-2.85,0) 3(-2.85,-2.3)
  rect 2.1x3.2 smd: 4(2.85,0)
  silkscreen extent -2.97,-3.35 1.5,3.43, body extent -1.85,-3.35 1.85,3.35, height 1.8
USB-MICRO-B_V [mm] "USB, MICRO B, Body 7.491x4.695 mm, Pitch 0.65 mm"
  rect 0.4x1.35 smd: 1(-1.3,1.35) 2(-0.65,1.35) 3(0,1.35) 4(0.65,1.35) 5(1.3,1.35)
  round 1.45 hole 0.85: 6(-2.5,1.35) 7(2.5,1.35)
  rrect50% 0x0 hole 0.6 slot 1.3 at 90 deg: 8(-3.5,-1.35) 11(3.5,-1.35)
  rect 1.5x1.9 smd: 9(-1,-1.35) 10(1,-1.35)
  Top Layer region: -3.6,-1.8 -3.6,-0.9 -4.1,-0.9 -4.1,-1.8
  Top Layer region: 3.6,-0.9 3.6,-1.8 4.1,-1.8 4.1,-0.9
  Top Layer region: 2.3,-0.4 2.3,-2.3 3.6,-2.3 3.6,-0.4
  Top Layer region: -2.3,-2.3 -2.3,-0.4 -3.6,-0.4 -3.6,-2.3
  Top Layer lines w0.5: 3.6,-2.05 cw(c3.6,-1.8) 3.506,-2.032 ; 3.6,-2.05 ccw(c3.6,-1.8) 3.6,-2.05 ; 3.6,-2.05 cw(c3.6,-1.8) 3.506,-2.032 ; 3.6,-2.05 ccw(c3.6,-1.8) 3.6,-2.05 ; 3.6,-2.05 ccw(c3.6,-1.8) 3.614,-2.05 ; 3.6,-2.05 ccw(c3.6,-1.8) 3.614,-2.05 ; 3.6,-2.05 ccw(c3.6,-1.8) 3.614,-2.05 ; 3.6,-2.05 ccw(c3.6,-1.8) 3.614,-2.05 ; -3.6,-2.05 cw(c-3.6,-1.8) -3.6,-1.55 ; -3.6,-2.05 ccw(c-3.6,-1.8) -3.469,-2.013 ; -3.6,-2.05 ccw(c-3.6,-1.8) -3.469,-2.013 ; 3.623,-2.049 ccw(c3.6,-1.8) 3.66,-2.043 ; 3.623,-2.049 ccw(c3.6,-1.8) 3.66,-2.043 ; 3.623,-2.049 ccw(c3.6,-1.8) 3.66,-2.043 ; 3.623,-2.049 ccw(c3.6,-1.8) 3.66,-2.043 ; 3.623,-2.049 cw(c3.6,-1.8) 3.623,-2.049 ; 3.623,-2.049 ccw(c3.6,-1.8) 3.623,-2.049 ; 3.623,-2.049 ccw(c3.6,-1.8) 3.623,-2.049 ; 3.623,-2.049 cw(c3.6,-1.8) 3.623,-2.049 ; 3.623,-2.049 cw(c3.6,-1.8) 3.623,-2.049 ; 3.623,-2.049 ccw(c3.6,-1.8) 3.623,-2.049 ; 3.623,-2.049 cw(c3.6,-1.8) 3.623,-2.049 ; 3.623,-2.049 ccw(c3.6,-1.8) 3.623,-2.049 ; 3.623,-2.049 cw(c3.6,-1.8) 3.614,-2.05 ; 3.623,-2.049 cw(c3.6,-1.8) 3.614,-2.05 ; 3.623,-2.049 cw(c3.6,-1.8) 3.614,-2.05 ; 3.623,-2.049 cw(c3.6,-1.8) 3.614,-2.05 ; 3.614,-2.05 ccw(c3.6,-1.8) 3.614,-2.05 ; 3.614,-2.05 ccw(c3.6,-1.8) 3.614,-2.05 ; 3.614,-2.05 ccw(c3.6,-1.8) 3.614,-2.05 ; 3.614,-2.05 ccw(c3.6,-1.8) 3.614,-2.05 ; 3.66,-2.043 ccw(c3.6,-1.8) 3.66,-2.043 ; 3.66,-2.043 ccw(c3.6,-1.8) 3.66,-2.043 ; 3.66,-2.043 ccw(c3.6,-1.8) 3.66,-2.043 ; 3.66,-2.043 ccw(c3.6,-1.8) 3.66,-2.043 ; 3.66,-2.043 ccw(c3.6,-1.8) 3.675,-2.038 ; 3.66,-2.043 ccw(c3.6,-1.8) 3.675,-2.038 ; 3.66,-2.043 ccw(c3.6,-1.8) 3.675,-2.038 ; 3.66,-2.043 ccw(c3.6,-1.8) 3.675,-2.038 ; 3.675,-2.038 ccw(c3.6,-1.8) 3.691,-2.033 ; 3.675,-2.038 ccw(c3.6,-1.8) 3.691,-2.033 ; 3.675,-2.038 ccw(c3.6,-1.8) 3.691,-2.033 ; 3.675,-2.038 ccw(c3.6,-1.8) 3.691,-2.033 ; 3.691,-2.033 ccw(c3.6,-1.8) 3.7,-2.029 ; 3.691,-2.033 ccw(c3.6,-1.8) 3.7,-2.029 ; 3.691,-2.033 ccw(c3.6,-1.8) 3.7,-2.029 ; 3.691,-2.033 ccw(c3.6,-1.8) 3.7,-2.029 ; 3.506,-2.032 cw(c3.6,-1.8) 3.5,-2.029 ; 3.506,-2.032 cw(c3.6,-1.8) 3.5,-2.029 ; 3.506,-2.032 cw(c3.6,-1.8) 3.5,-2.029 ; 3.506,-2.032 cw(c3.6,-1.8) 3.5,-2.029 ; 3.506,-2.032 ccw(c3.6,-1.8) 3.506,-2.032 ; 3.506,-2.032 ccw(c3.6,-1.8) 3.506,-2.032 ; 3.7,-2.029 ccw(c3.6,-1.8) 3.833,-1.891 ; 3.7,-2.029 ccw(c3.6,-1.8) 3.833,-1.891 ; 3.7,-2.029 ccw(c3.6,-1.8) 3.833,-1.891 ; 3.7,-2.029 ccw(c3.6,-1.8) 3.833,-1.891 ; 3.5,-2.029 cw(c3.6,-1.8) 3.5,-1.571 ; 3.5,-2.029 cw(c3.6,-1.8) 3.5,-1.571 ; 3.5,-2.029 cw(c3.6,-1.8) 3.5,-1.571 ; 3.5,-2.029 cw(c3.6,-1.8) 3.5,-1.571 ; -3.469,-2.013 ccw(c-3.6,-1.8) -3.376,-1.911 ; -3.469,-2.013 ccw(c-3.6,-1.8) -3.376,-1.911 ; -3.376,-1.911 ccw(c-3.6,-1.8) -3.367,-1.891 ; -3.376,-1.911 ccw(c-3.6,-1.8) -3.367,-1.891 ; 3.833,-1.891 ccw(c3.6,-1.8) 3.838,-1.877 ; 3.833,-1.891 ccw(c3.6,-1.8) 3.838,-1.877 ; 3.833,-1.891 ccw(c3.6,-1.8) 3.838,-1.877 ; 3.833,-1.891 ccw(c3.6,-1.8) 3.838,-1.877 ; -3.367,-1.891 ccw(c-3.6,-1.8) -3.375,-1.691 ; -3.367,-1.891 ccw(c-3.6,-1.8) -3.375,-1.691 ; 3.838,-1.877 ccw(c3.6,-1.8) 3.849,-1.823 ; 3.838,-1.877 ccw(c3.6,-1.8) 3.849,-1.823 ; 3.838,-1.877 ccw(c3.6,-1.8) 3.849,-1.823 ; 3.838,-1.877 ccw(c3.6,-1.8) 3.849,-1.823 ; 3.849,-1.823 ccw(c3.6,-1.8) 3.85,-1.8 ; 3.849,-1.823 ccw(c3.6,-1.8) 3.85,-1.8 ; 3.849,-1.823 ccw(c3.6,-1.8) 3.85,-1.8 ; 3.849,-1.823 ccw(c3.6,-1.8) 3.85,-1.8 ; 3.85,-1.8 ccw(c3.6,-1.8) 3.779,-1.625 ; 3.85,-1.8 ccw(c3.6,-1.8) 3.779,-1.625 ; 3.85,-1.8 ccw(c3.6,-1.8) 3.779,-1.625 ; 3.85,-1.8 ccw(c3.6,-1.8) 3.779,-1.625 ; -3.375,-1.691 ccw(c-3.6,-1.8) -3.383,-1.675 ; -3.375,-1.691 ccw(c-3.6,-1.8) -3.383,-1.675 ; -3.383,-1.675 ccw(c-3.6,-1.8) -3.401,-1.648 ; -3.383,-1.675 ccw(c-3.6,-1.8) -3.401,-1.648 ; -3.401,-1.648 ccw(c-3.6,-1.8) -3.475,-1.583 ; -3.401,-1.648 ccw(c-3.6,-1.8) -3.475,-1.583 ; 3.779,-1.625 ccw(c3.6,-1.8) 3.779,-1.625 ; 3.779,-1.625 ccw(c3.6,-1.8) 3.779,-1.625 ; 3.779,-1.625 ccw(c3.6,-1.8) 3.779,-1.625 ; 3.779,-1.625 ccw(c3.6,-1.8) 3.779,-1.625 ; 3.779,-1.625 ccw(c3.6,-1.8) 3.772,-1.619 ; 3.779,-1.625 ccw(c3.6,-1.8) 3.772,-1.619 ; 3.779,-1.625 ccw(c3.6,-1.8) 3.779,-1.625 ; 3.779,-1.625 ccw(c3.6,-1.8) 3.779,-1.625 ; 3.779,-1.625 ccw(c3.6,-1.8) 3.779,-1.625 ; 3.779,-1.625 ccw(c3.6,-1.8) 3.779,-1.625 ; 3.772,-1.619 ccw(c3.6,-1.8) 3.75,-1.6 ; 3.772,-1.619 ccw(c3.6,-1.8) 3.75,-1.6 ; 3.772,-1.619 ccw(c3.6,-1.8) 3.772,-1.619 ; 3.772,-1.619 ccw(c3.6,-1.8) 3.772,-1.619 ; 3.75,-1.6 ccw(c3.6,-1.8) 3.5,-1.571 ; 3.75,-1.6 ccw(c3.6,-1.8) 3.5,-1.571 ; 3.75,-1.6 ccw(c3.6,-1.8) 3.75,-1.6 ; 3.75,-1.6 ccw(c3.6,-1.8) 3.75,-1.6 ; -3.475,-1.583 ccw(c-3.6,-1.8) -3.546,-1.556 ; -3.475,-1.583 ccw(c-3.6,-1.8) -3.546,-1.556 ; 3.5,-1.571 ccw(c3.6,-1.8) 3.5,-1.571 ; 3.5,-1.571 ccw(c3.6,-1.8) 3.5,-1.571 ; -3.546,-1.556 ccw(c-3.6,-1.8) -3.579,-1.551 ; -3.546,-1.556 ccw(c-3.6,-1.8) -3.579,-1.551 ; -3.579,-1.551 ccw(c-3.6,-1.8) -3.597,-1.55 ; -3.597,-1.55 ccw(c-3.6,-1.8) -3.599,-1.55 ; -3.597,-1.55 ccw(c-3.6,-1.8) -3.599,-1.55 ; -3.599,-1.55 ccw(c-3.6,-1.8) -3.6,-1.55 ; -3.599,-1.55 ccw(c-3.6,-1.8) -3.6,-1.55 ; -3.599,-1.55 ccw(c-3.6,-1.8) -3.599,-1.55 ; -3.599,-1.55 ccw(c-3.6,-1.8) -3.599,-1.55 ; -3.599,-1.55 ccw(c-3.6,-1.8) -3.599,-1.55 ; -3.599,-1.55 ccw(c-3.6,-1.8) -3.599,-1.55 ; -3.599,-1.55 ccw(c-3.6,-1.8) -3.599,-1.55 ; -3.599,-1.55 ccw(c-3.6,-1.8) -3.599,-1.55 ; -3.6,-1.55 ccw(c-3.6,-1.8) -3.6,-1.55 ; -3.6,-1.55 ccw(c-3.6,-1.8) -3.6,-1.55 ; 3.6,-1.15 cw(c3.6,-0.9) 3.54,-1.143 ; 3.6,-1.15 ccw(c3.6,-0.9) 3.815,-0.772 ; 3.6,-1.15 ccw(c3.6,-0.9) 3.815,-0.772 ; -3.6,-1.15 ccw(c-3.6,-0.9) -3.85,-0.9 ; -3.6,-1.15 ccw(c-3.6,-0.9) -3.6,-1.15 ; -3.6,-1.15 cw(c-3.6,-0.9) -3.786,-1.068 ; -3.6,-1.15 cw(c-3.6,-0.9) -3.786,-1.068 ; -3.6,-1.15 ccw(c-3.6,-0.9) -3.85,-0.9 ; 3.54,-1.143 cw(c3.6,-0.9) 3.5,-1.129 ; 3.54,-1.143 cw(c3.6,-0.9) 3.5,-1.129 ; 3.5,-1.129 cw(c3.6,-0.9) 3.385,-0.772 ; 3.5,-1.129 cw(c3.6,-0.9) 3.385,-0.772 ; -3.786,-1.067 cw(c-3.6,-0.9) -3.85,-0.9 ; -3.786,-1.067 cw(c-3.6,-0.9) -3.85,-0.9 ; -3.786,-1.067 ccw(c-3.6,-0.9) -3.786,-1.068 ; -3.786,-1.067 ccw(c-3.6,-0.9) -3.786,-1.068 ; 3.815,-0.772 ccw(c3.6,-0.9) 3.5,-0.671 ; 3.815,-0.772 ccw(c3.6,-0.9) 3.5,-0.671 ; 3.385,-0.772 cw(c3.6,-0.9) 3.5,-0.671 ; 3.385,-0.772 cw(c3.6,-0.9) 3.5,-0.671
  silkscreen extent -3.75,-3.5 3.75,2.7, body extent -4.1,-3.9 4.1,1.5, height 2.67
XDCR_BMI270 [mm]
  rect 0.475x0.25 smd: 1(-1.162,0.75) 2(-1.162,0.25) 3(-1.162,-0.25) 4(-1.162,-0.75) 8(1.162,-0.75) 9(1.162,-0.25) 10(1.162,0.25) 11(1.162,0.75)
  rect 0.25x0.475 smd: 5(-0.5,-0.913) 6(0,-0.913) 7(0.5,-0.913) 12(0.5,0.913) 13(0,0.913) 14(-0.5,0.913)
  silkscreen extent -2.07,-1.25 1.5,1.25, body extent -1.5,-1.25 1.5,1.25, height 0.87

## Part data
3.3V 5V 9V Status: library part CMP-08952-000013-1, "LED GREEN CLEAR 0805 SMD", Colour=Green, Forward Current=20mA, Forward Voltage=2.2V, Manufacturer=ROHM, Package=SML-210, Power Dissipation=70mW, Reverse Voltage=4V, Temperature="-30°C to +85°C", Temperature Range High=+85°C, Temperature Range Low=-30°C, Automotive=No, Category=Diode, ComponentLink2Description=Datasheet, ComponentLink2URL=https://www.mouser.in/ds/2/348/sml-21-313092.pdf, Device Class L1=Optoelectronics, Device Class L2=LEDs, Device Class L3=unset, Digikey Description="LED GREEN CLEAR 0805 SMD", Height=0.90mm, Ipc Land Pattern Name=DIOCP200125X25, Lead Free=Yes, Led Orientation="Top View", Luminous Intensity=16mcd, Manufacturer Part Number=SML-210MTT86, Mouser Description="Standard LEDs - SMD GREEN SMD TRANS LENS", Octopart=https://octopart.com/sml-210mtt86-rohm-550711, Peak Emmision Wavelength=573nm, RoHS=TRUE, Wavelength=570nm
C0.1uf_1 C0.1uf_2 C0.1uf_5 C0.1uf_6 C0.1uf_7 C0.1uf_8: library part CMP-2100-03641-2, "CAP CER 0.1UF 16V X7R 0402", Capacitance=0.10μF, Manufacturer=Murata, Package=GRM15, Temperature="-55°C to +125°C", Temperature Characteristic=X7R, Temperature Range High=+125°C, Temperature Range Low=-55°C, Tolerance=10%, Voltage Rating=16Vdc, Category=Cap, ComponentLink2Description=Datasheet, ComponentLink2URL=https://search.murata.co.jp/Ceramy/image/img/A01X/G101/ENG/GRM155R71H471KA01-01A.pdf, Device Class L1="Passive Components", Device Class L2=Capacitors, Device Class L3="Ceramic Capacitors", Digikey Description="CAP CER 0.1UF 16V X7R 0402", Height=0.55mm, Ipc Land Pattern Name=CAPC10050X219, Lead Free=yes, Manufacturer Part Number=GRM155R71C104KA88D, Material=Ceramic, Mouser Description="0402 0.1 uF 16V ±10 % Tolerance X7R SMT Multilayer Ceramic Capacitor", Octopart=https://octopart.com/grm155r71c104ka88d-murata-196880, RoHS=TRUE, Standoff Height=0mm
C0.47uf_2: library part CMP-2006-02860-2, "Chip Multilayer Ceramic Capacitors for General Purpose, 0603, 0.47uF, X7R, 15%, 10%, 16V", Capacitance=470nF, Case Code (Imperial)=0603, Case Code (Metric)=1608, Dielectric=X7R, Max Operating Temperature=125°C, Min Operating Temperature=-55°C, Package Quantity=1, Tolerance=10%, Voltage=16V, Case/Package=0603, Depth=0.8mm, Height=0.8mm, Lead Free="Lead Free", Length=1.6mm, Material=Ceramic, Mount="Surface Mount", Number of Pins=2, Packaging="Tape and Reel", REACH SVHC="No SVHC", Termination=SMD/SMT, Thickness=0.035inch, Voltage Rating=16V, Voltage Rating (DC)=16V, Width=0.8mm
C2.2nf_1: library part CMP-2006-02908-5, "Chip Capacitor, 2.2 nF, +/- 10%, 50 V, -55 to 125 degC, 0603 (1608 Metric), RoHS, Tape and Reel", Manufacturer=Murata, Max Operating Temperature="125 degC", Min Operating Temperature="-55 degC", Package Quantity=4000, Voltage Rating="50 V", ComponentLink1Description="Manufacturer URL", ComponentLink1URL=http://www.murata.com/, ComponentLink2Description=Datasheet, ComponentLink2URL=http://search.murata.co.jp/Ceramy/image/img/A01X/G101/ENG/GRM188R71H222KA01-01.pdf, DatasheetVersion=02/2016, Height="0.8 mm", Lead Pitch="4 mm", Length="1.6 mm", Mount="Surface Mount", Mounting Technology="Surface Mount", PackageDescription="2-Pin Surface Mount Device, Body 1.6 x 0.8 mm", PackageReference=0603, Packaging="Tape and Reel", Pins=2, REACH SVHC="No SVHC", RoHSCompliant=true
C10u_1 C10uf_2 C10uf_3 C10uf_4: library part CMP-2006-02792-2, "Chip Multilayer Ceramic Capacitors for General Purpose, 0603, 10uF, X5R, 15%, 20%, 6.3V", Capacitance=10uF, Case Code (Imperial)=0603, Case Code (Metric)=1608, Dielectric=X5R, Max Operating Temperature=85°C, Min Operating Temperature=-55°C, Package Quantity=4000, Tolerance=20%, Voltage=6.3V, Case/Package=0603, Depth=0.8mm, Height=0.8mm, Lead Free="Lead Free", Length=1.6mm, Material=Ceramic, Mount="Surface Mount", Packaging="Tape and Reel", Radiation Hardening=No, REACH SVHC="No SVHC", Termination=SMD/SMT, Thickness=0.035inch, Voltage Rating=6.3V, Voltage Rating (DC)=6.3V, Width=0.031inch
C18pf_1 CC18pf_2: library part CMP-2007-00302-2, "CAP CER 18PF 50V C0G/NP0 0805", Capacitance="18 pF", Manufacturer=KEMET, Package=C0805C-DN, Temperature="-55°C to +125°C", Temperature Characteristic=C0G, Temperature Coefficient=30ppm/°C, Temperature Range High=+125°C, Temperature Range Low=-55°C, Tolerance=0.05, Voltage Rating="50 V", Automotive=No, Category=Cap, ComponentLink2Description=Datasheet, ComponentLink2URL=https://content.kemet.com/datasheets/KEM_C1003_C0G_SMD.pdf, Device Class L1="Passive Components", Device Class L2=Capacitors, Device Class L3="Ceramic Capacitors", Digikey Description="CAP CER 18PF 50V C0G/NP0 0805", Height=0.88mm, Ipc Land Pattern Name=CAPC200125X78, Lead Free=Yes, Manufacturer Part Number=C0805C180J5GACTU, Material=Ceramic, Mouser Description="Cap Ceramic 18pF 50V C0G 5% SMD 0805 125C Paper T/R", Octopart=https://octopart.com/c0805c180j5gactu-kemet-144810, RoHS=TRUE
C22_uf_2 C22uf_4: library part CMP-2007-03385-2, "Chip Multilayer Ceramic Capacitors for General Purpose, 0805, 22uF, X5R, 15%, 20%, 6.3V", Capacitance=22uF, Case Code (Imperial)=0805, Case Code (Metric)=2012, Dielectric=X5R, Max Operating Temperature=85°C, Min Operating Temperature=-55°C, Package Quantity=1, Tolerance=20%, Voltage=6.3V, Case/Package=0805, Depth=1.25mm, Height=1.25mm, Lead Free="Lead Free", Length=2mm, Material=Ceramic, Mount="Surface Mount", Packaging="Tape and Reel", Radiation Hardening=No, REACH SVHC="No SVHC", Termination=SMD/SMT, Thickness=0.053inch, Voltage Rating=6.3V, Voltage Rating (DC)=6.3V, Width=0.049inch
C100nf C100nf_1 C100nf_2 C100nf_3 C100nf_4 C100nf_5 C100nf_6 C100nf_7 C100nf_B1 C100nf_B2: library part CMP-2008-02046-2, "CAP CER 0.1UF 10V X5R 0402", Capacitance="0.10 μF", Manufacturer=Kemet, Package=C0402-BB, Temperature="-55°C to +125°C", Temperature Characteristic=X5R, Temperature Coefficient=15%, Temperature Range High=+125°C, Temperature Range Low=-55°C, Tolerance=0.1, Voltage Rating="10 V", Automotive=No, Category=Cap, ComponentLink2Description=Datasheet, ComponentLink2URL=https://content.kemet.com/datasheets/KEM_C1002_X7R_SMD.pdf, Device Class L1="Passive Components", Device Class L2=Capacitors, Device Class L3="Ceramic Capacitors", Digikey Description="CAP CER 0.1UF 10V X5R 0402", Height=0.55mm, Ipc Land Pattern Name=CAPC10050X50, Lead Free=Yes, Manufacturer Part Number=C0402C104K8PACTU, Material=Ceramic, Mouser Description="Capacitor 100 nF 10 VDC 0402", Octopart=https://octopart.com/c0402c104k8pactu-kemet-140039, RoHS=TRUE
C100uf_3 C100uf_4: library part CMP-2000-05259-2, "CAP CER 100UF 6.3V X5R 1210", 3DS Part Number=220-00002, Capacitance=100uF, Manufacturer=Murata, Package=GRM32-0.3, Temperature="-55°C to +85°C", Temperature Characteristic=X5R, Temperature Coefficient=15%, Temperature Range High=+85°C, Temperature Range Low=-55°C, Tolerance=20%, Voltage=6.3V, Automotive=No, Category=Cap, ComponentLink2Description=Datasheet, ComponentLink2URL=https://search.murata.co.jp/Ceramy/image/img/A01X/G101/ENG/GRM32ER60J107ME20-01.pdf, Device Class L1="Passive Components", Device Class L2=Capacitors, Device Class L3="Ceramic Capacitors", Digikey Description="CAP CER 100UF 6.3V X5R 1210", Height=2.7mm, Ipc Land Pattern Name=CAPC320250X250, Lead Free=Yes, Manufacturer Part Number=GRM32ER60J107ME20L, Material=Ceramic, Octopart=https://octopart.com/grm32er60j107me20l-murata-197007, RoHS=TRUE, Voltage Rating=6.3V
CD1: library part CMP-2000-05248-1, "Micro SD Memory Card Connector, 0.5 A, 10 V (DC), -25 to 85 degC, 8-Pin SMT, RoHS, Tape and Reel", Manufacturer=Molex, Standard Package=1, 3D Model=502774-0891.stp, Card Type=SecureDigital-microSD™, Catalog Drawings=502774-0891, Category=Connectors,Interconnects, Connector Type=ConnectorandEjector, Contact Finish=Gold, Contact Finish Thickness=20µin(0.51µm), Datasheet URL=https://datasheet.ciiva.com/1104/1499551-1104671.pdf, Datasheet Version="Rev. D, 04/2004", Ejector Side=-, Family=MemoryConnectors-PCCardSockets, Features=Switch, Height Above Board="0.071\"(1.80mm)", Insertion, Removal Method=PushIn,PushOut, Manufacturer URL=http://www.molex.com/, Mounting Feature=Reverse-Bottom, Mounting Type=SurfaceMount,RightAngle, Number of Positions=10(8+2), Online Catalog=microSD™Series, Other Names=WM24066DKR, Packaging=Digi-Reel, RoHS Information=502774-0891CertofCompliance, Series=502774
D1: library part CMP-14398-000007-1, "DIODE ARRAY SCHOTTKY 30V SOT23", Ambient Temperature Range High=+150°C, Ambient Temperature Range Low=-55°C, Capacitance=10pF, Forward Current=200mA, Manufacturer=Nexperia, Max Surge Forward Current=600mA, Package=SOT23, Peak Reverse Current=2uA, Reverse Voltage=30V, Temperature="to +150°C", Automotive=Yes, Automotive Grade="Grade 0", Category=Diode, ComponentLink2Description=Datasheet, ComponentLink2URL=https://assets.nexperia.com/documents/data-sheet/BAT54_SER.pdf, Device Class L1="Discrete Semiconductors", Device Class L2=Diodes, Device Class L3="Schottky Diodes", Digikey Description="DIODE ARRAY SCHOTTKY 30V SOT23", Footprint Url=https://assets.nexperia.com/documents/outline-drawing/SOT23.pdf, Height=1.1mm, Ipc Land Pattern Name=SOT95P230X100-3, Lead Free=Yes, Manufacturer Part Number=BAT54C,215, Max Junction Temp=+150°C, Mouser Description="Schottky Diodes, Rectifiers - Arrays SOT-23 (TO-236AB) 30V 200mA (DC) Surface Mount", Octopart=https://octopart.com/bat54c%2C215-nexperia-78738945, RoHS=TRUE, Temperature Range High=+150°C
J1: library part CMP-2000-05827-1, "Micro-USB B Receptacle, Right Angle, Bottom Mount, Surface Mount, with Solder Tabs, -30 to 85 degC, 5-Pin USB, RoHS, Tape and Reel", Manufacturer=Molex, Package Description="5-Leads USB, Micro B, Body 7.5 x 5 mm, Pitch 0.65 mm", Package Reference=MICRO-B, Package Version="Rev. F, 12/2012", Standard Package=1, Voltage - Max=30V, 3D Model=105017-0001.stp, Catalog Drawings=1050170001, Category=Connectors,Interconnects, Circuits=5, Connector Type=USB-microB, Datasheet URL=http://www.molex.com/elqNow/elqRedir.htm?ref=http://www.molex.com/webdocs/datasheets/pdf/en-us/1050170001_IO_CONNECTORS.pdf, Datasheet Version=03/2016, Family=USB,DVI,HDMIConnectors, Featured Product=Micro-USBConnectorsUSBConnectors, Features=Shielded,SolderRetention, Gender=Receptacle, Ingress Protection=-, Manufacturer URL=http://www.molex.com/, Mating Products=WM17145-ND-CABLEMICROUSBBTOSTDA1.0MWM17147-ND-CABLEMICROUSBBTOSTDA2.0MWM17146-ND-CABLEMICROUSBBTOSTDA1.5M, Mounting Technology=SurfaceMount, Mounting Type=BoardCutout,SurfaceMount,RightAngle, Number of Contacts=5, Online Catalog=Molex-MicroUSB, Other Names=WM1399DKR, Package URL=http://www.molex.com/pdm_docs/sd/1050170001_sd.pdf, Packaging=Digi-Reel®, PCN Assembly/Origin=ResinSupplier21/Oct/2015, RoHS Information=1050170001CertofCompliance, Series=-, Specifications=-
P1: library part CMP-2000-07082-1, "Male Header, Pitch 1 mm, 1 x 8 Position, Height 2.95 mm, -25 to 85 degC, RoHS, Tape and Reel", Manufacturer=JST, Package Description="Male Header, Pitch 1 mm, 1 x 8 Position, Height 2.95 mm", Package Reference=SM08B-SRSS-TB, Datasheet URL=http://www.jst-mfg.com/product/pdf/eng/eSR.pdf, Datasheet Version=11/2010, Manufacturer URL=http://www.jst.com/home2.html, Mounting Technology=SurfaceMount, No of Positions=8, Pitch=1mm, Style/Orientation=RightAngleHeader/Plug, Termination=Crimp, Type=ShroudedHeader
P2 P3: library part CMP-2000-07080-1, "Male Header, Pitch 1 mm, 1 x 6 Position, Height 2.95 mm, -25 to 85 degC, RoHS, Tape and Reel", Manufacturer=JST, Package Description="Male Header, Pitch 1 mm, 1 X 6 Position, Height 2.9 mm", Package Reference=SM06B-SRSS-TB, Datasheet URL=https://datasheet.ciiva.com/26894/getdatasheetpartid-708885-26894671.pdf, Datasheet Version=11/2010, Manufacturer URL=http://www.jst.com/home2.html, Mounting Technology=SurfaceMount, No of Positions=6, Pitch=1mm, Style/Orientation=RightAngleHeader/Plug, Termination=Solder, Type=ShroudedHeader
P5: library part CMP-2000-07077-1, "Male Header, Pitch 1 mm, 1 x 3 Position, Height 2.9 mm, -25 to 85 degC, RoHS, Tape and Reel", Manufacturer=JST, Package Description="Male Header, Pitch 1 mm, 1 x 3 Position, Height 2.9 mm", Package Reference=SM03B-SRSS-TB, Datasheet URL=https://datasheet.ciiva.com/26894/getdatasheetpartid-708885-26894671.pdf, Datasheet Version=11/2010, Manufacturer URL=http://www.jst.com/home2.html, Mounting Technology=SurfaceMount, No of Positions=3, Pitch=1mm, Style/Orientation=RightAngleHeader/Plug, Termination=Crimp, Type=ShroudedHeader
R1K_1 R1K_2 R1K_3 R4_LED R5_LED: library part CMP-1666-00003-5, "RES Thick Film, 1kΩ, 1%, 0.1W, 100ppm/°C, 0603", Case Code (Imperial)=0603, Case Code (Metric)=1608, Max Operating Temperature=155°C, Max Power Dissipation=100mW, Min Operating Temperature=-55°C, Package Quantity=10, Resistance=1kR, Temperature Coefficient=100ppm/°C, Tolerance=1%, Voltage Rating=75V, Case/Package=0603, Composition="Thick Film", Contact Plating=Tin, Depth=0.85mm, Features="Automotive AEC-Q200", Height=0.45mm, Lead Free="Lead Free", Length=1.55mm, Military Standard=Not, Mount="Surface Mount", Number of Pins=2, Number of Terminations=2, Packaging="Tape and Reel", Power Rating=100mW, Radiation Hardening=No, Termination=SMD/SMT, Voltage Rating (DC)=75V, Weight=7.1E-05oz, Width=0.033inch
R2.2K_1 R2.2K_2: library part CMP-2000-03167-1, Manufacturer="Vishay Dale", Part Number=CRCW06032K20FKEA
R4.7K_1: library part CMP-2002-00051-3, "RES Thick Film, 4.7kΩ, 1%, 0.063W, 100ppm/°C, 0402", Case Code (Imperial)=0402, Case Code (Metric)=1005, Max Operating Temperature=155°C, Max Power Dissipation=63mW, Min Operating Temperature=-55°C, Package Quantity=10, Resistance=4.7kR, Temperature Coefficient=100ppm/°C, Tolerance=1%, Voltage Rating=50V, Case/Package=0402, Composition="Thick Film", Contact Plating=Tin, Depth=0.5mm, Features="Automotive AEC-Q200", Height=0.35mm, Lead Free="Lead Free", Length=1mm, Military Standard=Not, Mount="Surface Mount", Number of Terminations=2, Packaging="Tape and Reel", Power Rating=63mW, Radiation Hardening=No, Termination=SMD/SMT, Voltage Rating (DC)=50V, Weight=2.3E-05oz, Width=0.5mm
R6_LED R7_LED R8_LED: library part CMP-2000-03159-1, Manufacturer="Vishay Dale", Part Number=CRCW06032K00FKEA
R10K_1 R10K_2 R10K_3 R10K_4: library part CMP-1666-00005-4, "Chip Resistor, 10 KOhm, +/- 1%, 100 mW, -55 to 155 degC, 0603 (1608 Metric), RoHS, Tape and Reel", Manufacturer="Vishay Semiconductor", Max Operating Temperature="155 degC", Min Operating Temperature="-55 degC", Package Quantity=5000, Voltage Rating="75 V", ComponentLink1Description="Manufacturer URL", ComponentLink1URL=http://www.vishay.com/, ComponentLink2Description=Datasheet, ComponentLink2URL=https://datasheet.ciiva.com/11809/0900766b80d98afc-11809037.pdf, DatasheetVersion=06/2012, Height="0.45 mm", Length="1.55 mm", Mounting Technology="Surface Mount", PackageDescription="2-Pin Surface Mount Device, Body 1.575 x 0.85 mm", PackageReference=0603, Packaging="Tape and Reel", REACH SVHC=Unknown, RoHSCompliant=true
R22_1 R22_2: library part CMP-2002-08382-1, Manufacturer="Vishay Dale", Part Number=CRCW040222R0FKED
R75_1 R75_2: library part CMP-2000-00639-1, Manufacturer=Panasonic, Part Number=ERJ-3EKF75R0V
R150_1: library part CMP-2000-03913-2, "RES Thick Film, 150Ω, 1%, 0.1W, 100ppm/°C, 0603", Case Code (Imperial)=0603, Case Code (Metric)=1608, Max Operating Temperature=155°C, Max Power Dissipation=100mW, Min Operating Temperature=-55°C, Package Quantity=10, Resistance=150R, Temperature Coefficient=100ppm/°C, Tolerance=1%, Voltage Rating=75V, Case/Package=0603, Composition="Thick Film", Contact Plating=Tin, Depth=0.85mm, Features="Automotive AEC-Q200", Height=0.45mm, Lead Free="Lead Free", Length=1.55mm, Military Standard=Not, Mount="Surface Mount", Number of Terminations=2, Packaging="Tape and Reel", Power Rating=100mW, Radiation Hardening=No, Termination=SMD/SMT, Voltage Rating (DC)=75V, Weight=7.1E-05oz, Width=0.033inch
SW1: library part CMP-08834-000005-1, "SWITCH TACTILE SPST-NO 0.05A 12V", Ambient Temperature Range High=+70°C, Ambient Temperature Range Low=-25°C, Contact Current Rating=50mA, Contact Resistance=100mΩ, Manufacturer=Omron, Operating Force=1.5N, Package=0, Temperature="-25°C to +70°C", Voltage Rating Dc=12V, Automotive=No, Category=Switch, ComponentLink2Description=Datasheet, ComponentLink2URL=https://omronfs.omron.com/en_US/ecb/products/pdf/en-b3u.pdf, Device Class L1=Electromechanical, Device Class L2=Switches, Device Class L3="Tactile Switches", Digikey Description="SWITCH TACTILE SPST-NO 0.05A 12V", Electromechanical Life=200000Cycles, Height=1.75mm, Lead Free=Yes, Manufacturer Part Number=B3U-1000P-B, Mount="Surface Mount", Mouser Description="Tactile Switches Top Actuated with boss w/o ground", Octopart=https://octopart.com/b3u-1000p-b-omron-1057356, RoHS=TRUE, Temperature Range High=+70°C, Temperature Range Low=-25°C, Throw Configuration=SPST-NO
U1: library part CMP-12105-000139-1, "IC MCU 32BIT 512KB FLASH 64LQFP", Case/Package=LQFP, Frequency=216MHz, Max Operating Temperature=85°C, Min Operating Temperature=-40°C, Core Architecture=ARM, Interface=I2C, Memory Size=512KB, Memory Type=FLASH, Mount="Surface Mount", Number of I/Os=50, Oscillator Type=Internal, Packaging=Tray, Peripherals="Brown-out Detect/Reset"
U2: library part CMP-010-00024-1, "Accelerometer, Gyroscope, 6 Axis Sensor IÂ²C, SPI Output", Case/Package="LGA-14 Bosch Sensortec", Check_prices=https://www.snapeda.com/parts/BMI270/Bosch+Sensortec/view-part/?ref=eda, Component Type=Standard, Design Item ID=BMI270, Digi-Key_Part_Number=828-1091-2-ND, MF="Bosch Sensortec", MP=BMI270, Pins=14, Purchase-URL=https://pricing.snapeda.com/search/part/BMI270/?ref=eda, SnapEDA_Link=https://www.snapeda.com/parts/BMI270/Bosch+Sensortec/view-part/?ref=snap, Source=BMI270.SchLib
U3: library part CMP-2000-05076-3, "SENSOR PRESSURE ABS", Case/Package=SMD/SMT, Max Operating Temperature=85°C, Min Operating Temperature=-40°C, Operating Pressure=15.95PSI, Lead Free="Lead Free", Max Pressure=290.08PSI, Number of Pins=8, Output Type=SPI, Port Style="No Port", Pressure Type=Absolute, Termination=SMD/SMT
U5: library part CMP-2000-07341-2, "IC REG LINEAR 5V 100MA SOT89-3", Dropout Voltage=1.7V, Manufacturer="Texas Instruments", Max Junction Temp=+125°C, Max Supply Voltage=20V, Min Supply Voltage=7V, Nominal Supply Current=3.8mA, Output Current=100mA, Output Voltage=5V, Package=PK0003A, Temperature="0°C to +125°C", Temperature Range Low=0°C, Accuracy Percentage=3.75%, Automotive=No, Category=IC, ComponentLink2Description=Datasheet, ComponentLink2URL=https://www.ti.com/lit/ds/symlink/ua78l.pdf, Device Class L1="Integrated Circuits (ICs)", Device Class L2="Power Management ICs", Device Class L3="Voltage Regulators - Linear", Digikey Description="IC REG LINEAR 5V 100MA SOT89-3", Height=1.6mm, Lead Free=Yes, Manufacturer Part Number=UA78L05CPK, Mouser Description="100-mA, 30-V VIN, Positive-Voltage Linear Regulators 3-SOT-89 0 to 125", Number of Outputs=1, Octopart=https://octopart.com/ua78l05cpk-texas+instruments-525289, Output Type=Fixed, RoHS=TRUE, Temperature Range High=+125°C
U6: library part CMP-0244-00310-1, "Fixed Low Drop Positive Voltage Regulator, 3.3V, 4-Pin SOT-223, Tape and Reel", ComponentLink1Description="Manufacturer URL", ComponentLink1URL=http://www.st.com, ComponentLink2Description=Datasheet, ComponentLink2URL=http://www.st.com/internet/com/TECHNICAL_RESOURCES/TECHNICAL_LITERATURE/DATASHEET/CD00000544.pdf, DatasheetVersion=1/11/2011, PackageDescription="4-Pin SOT-223 Package, 6.5 x 3.5 mm Body, 2.3 mm Pitch, 7 mm Lead Span", PackageReference=SOT-223, PackageVersion=2010
U8: library part CMP-05676-000004-1, "IC DISPLAY 1CH W/EEPROM 28TSSOP", Manufacturer="Maxim Integrated", Max Junction Temp=+150°C, Max Supply Voltage=5.25V, Min Supply Voltage=4.75V, Nominal Supply Current=24-58mA, Package=U28E-5, Temperature="-40°C to +85°C", Temperature Range High=+85°C, Temperature Range Low=-40°C, Automotive=No, Category=IC, ComponentLink2Description=Datasheet, ComponentLink2URL=https://datasheets.maximintegrated.com/en/ds/MAX7456.pdf, Device Class L1="Integrated Circuits (ICs)", Device Class L2="Interface ICs", Device Class L3=unset, Digikey Description="IC DISPLAY 1CH W/EEPROM 28TSSOP", Footprint Url=https://pdfserv.maximintegrated.com/package_dwgs/21-0108.PDF, Height=1.1mm, Interface=SPI, Ipc Land Pattern Name=SOP65P638X110-28, Lead Free=Yes, Manufacturer Part Number=MAX7456EUI+T, Obsolete Part=true, Octopart=https://octopart.com/max7456eui%2Bt-maxim+integrated-42626431, RoHS=TRUE, Standoff Height=0.05mm
U9: library part CMP-04917-000367-1, "IC OPAMP", RoHS Compliant=Yes
X1: library part CMP-2100-03620-1, "Ceramic Resonator, 8 MHz, +/- 0.5%, -20 to 80 degC, 3-Pin SMD, RoHS, Tape and Reel", Capacitance=33pF, Case/Package=Ceramic, Frequency=8MHz, Frequency Stability=0.2%, Frequency Tolerance=0.5%, Manufacturer=Murata, Max Operating Temperature=80degC, Min Operating Temperature=-20degC, Package Description="3-Pin Surface Mount Device, Body 3.2 x 1.3 mm, Pitch 1.2 mm", Package Quantity=1, Package Reference=CSTCE_G_A-3, Composition=Ceramic, Contact Plating=Gold, Datasheet URL=http://www.murata.com/~/media/webrenewal/support/library/catalog/products/timingdevice/ceralock/p16e.ashx, Datasheet Version=42339.0, Height=0.031inch, Lead Free=LeadFree, Length=0.126inch, Load Capacitance=33pF, Manufacturer URL=http://www.murata.com/, Mount=SurfaceMount, Number of Pins=3, Packaging=TapeandReel, REACH SVHC=NoSVHC, RoHSCompliant=True, Self Resonant Frequency=8MHz, Termination=SMD/SMT, Tolerance=0.5%, Width=0.051inch
Y2: library part CMP-27762-013610-1, "Crystal 27MHz ±20ppm 18pF SMD-2 5mm x 3.2mm", Case/Package=SMD/SMT, ESR (Equivalent Series Resistance)=30R, Frequency=27MHz, Frequency Stability=30ppm, Frequency Tolerance=20ppm, Load Capacitance=18pF, Max Operating Temperature=85°C, Min Operating Temperature=-40°C, Package Quantity=1000, Resistor Type=Ceramic, Depth=3.2mm, Height=0.051inch, Lead Free="Lead Free", Length=5mm, Mount="Surface Mount", Number of Pins=2, Packaging="Tape and Reel", REACH SVHC="No SVHC", RoHS Compliant=Yes, Series=ABM3, Series Resistance=30R, Termination=SMD/SMT, Tolerance=20ppm, Width=0.126inch

## Free pads (board coordinates)
  rrect50% 1.524x2 hole 0.762: 5(38.5,42.5) 6(36,42.5) 7(33.5,42.408) 8(31,42.5) 9(28.5,42.5) 10(23.5,42.5) 11(26,42.5) 12(13.5,40) 13(16,40) 14(21,42.5) 15(18.5,42.5) 16(16,42.5) 17(13.5,42.5) 31(16,2.75) 32(41,2.75) 33(21,2.75) 34(18.5,2.75) 35(26,2.75) 36(13.5,2.75) 37(28.5,2.75) 38(30.75,2.75) 39(33.5,2.75) 40(23.5,2.75) 41(36,2.75) 42(38.5,2.75) 43(18.5,40) 44(21,40) 46(23.5,40) 48(26,40) 50(28.5,40) 51(31,40) 53(33.5,40) 54(36,40) 55(38.5,40)
  round 4 hole 4: 56(11,7) 57(41.5,37.5) 59(11,37.5) 60(41.5,7)
  round 0.787 smd: 61(3.251,5.436) 62(4.521,5.436) 63(4.521,6.706) 64(3.251,7.976) 65(4.521,7.976) 66(3.251,6.706)
  round 0.991 hole 0.991: 67(2.87,9.246) 67(3.886,4.166) 67(4.902,9.246)

## Via types
v1: diameter 1.27, hole 0.711, Top Layer to Bottom Layer, 96 vias

## Nets (pads, with @x,y where several pads share a name; then routed paths per layer and width w, separated by ;. In a path a pad name is that pad's centre, name@x,y a point inside that pad or via, vN(x,y) a via of type N, cw(c..) or ccw(c..) an arc to the next point about the centre after c; other vN are vias at no path point)
5V: C0.1uf_6.1 C0.1uf_7.1 C0.1uf_8.1 C10uf_2.1 D1.1 P2.4 P5.1 pad.12 R1K_1.1 R1K_2.1 R1K_3.1 R6_LED.2 U5.1 U8.3 U8.21 U8.24 | length 209.9
  Top Layer w0.15: v1(7.366,35.306) 7.366,35.003 7.8,34.569 7.8,33.625 R6_LED.2@8.175,33.25 8.175,37.822 10.353,40 pad.12@13.5,40 ; R6_LED.2@8.175,33 R6_LED.2@8.175,33.075 ; C10uf_2.1@41,24.802 41,24.9 43.075,26.975 43.075,27.275 43.3,27.5 43.7,27.5 43.7,25.6 43.1,25 D1.1@43.05,24.95 ; D1.1@43,24.95 D1.1@43.05,24.95 ; v1(48.5,23) 46.975,24.525 45.443,24.525 43.275,24.725 D1.1@43.05,24.95
  Int2 (Sign) w0.15: v1(7.366,35.306) 7.366,32.824 7,32.458 7,30.278 7,30.216 7.085,30.131 12.028,25.731 cw(c11.387,25.011) 12.351,25.004 12.352,24.91 cw(c11.388,24.906) 12.352,24.897 12.344,24.077 12.25,18.873 12.25,18.25 v1(13.25,17.25) 14.305,16.195 v1@14.305,7.396 ; v1(14.446,6.804) 14.514,6.804 17.248,4.07 27.75,4.07 27.798,4.022 33.25,4.022 ; v1(33.242,5.98) 33.242,4.029 33.25,4.022 ; v1(45.067,4.549) 44.906,4.549 44.378,4.022 33.25,4.022 ; v1@45.147,4.549 48.786,8.188 48.786,14.399 49.714,15.327 49.714,21.786 v1(48.5,23) ; v1(45.396,37.815) 47.943,35.799 47.95,35.793 48,35.743 v1@48,23.14
  Bottom Layer w0.15: v1(13.25,17.25) 13.25,17 R1K_1.1@13.75,16.5 ; v1@14.251,6.737 14.013,6.103 13.953,6.043 12.04,5.033 12.037,5.031 cw(c11,7) 11.094,4.777 cw(c11,7) 10.855,4.78 7.989,4.909 7.547,4.91 6.982,4.345 6.982,3.547 7,3.528 7,2.588 7.088,2.5 8.688,2.5 10.156,3.969 13.031,3.969 13.038,3.975 13.475,3.975 19.875,10.375 ; v1@14.57,6.89 14.57,8.58 14.063,9.088 15.557,9.088 U8.3@15.57,9.075 ; U8.3@15.808,9.088 U8.3@15.82,9.075 ; U8.24@20.93,10.375 19.875,10.375 ; U8.21@20.93,12.325 20.42,12.325 20.185,12.09 20.029,12.09 19.75,11.811 19.75,10.5 19.875,10.375 ; U8.21@21.18,12.325 22.12,12.325 22.395,12.6 C0.1uf_6.1@23,12.6 25.85,12.6 26.175,12.925 33.082,12.925 33.082,16.608 32.94,16.75 27.5,16.75 27.25,16.5 R1K_2.1@27.25,15.5 R1K_3.1@27.25,14 R1K_3.1@27.25,14.125 ; C0.1uf_8.1@23,9.85 25.932,9.85 26.407,9.375 31.238,9.375 32.065,8.548 32.214,8.399 32.214,7.008 v1(33.242,5.98) ; v1(45.067,4.549) 45.37,4.549 45.821,5 P2.4@48.05,5 ; v1(45.396,37.815) 45.25,37.961 45.25,40.25 45.449,40.449 45.449,41.199 45.75,41.5 P5.1@48.05,41.5
5V_USB: D1.2 J1.1 R4.7K_1.1 | length 77.9
  Top Layer w0.15: J1.1@4.144,23.144 4.619,23.144 4.982,23.506 7.85,23.506 8.75,24.406 v1(8.75,25.5) ; v1(24.247,30.786) 25.039,30.411 R4.7K_1.1@25.25,30.202 ; D1.2@43,23.05 45.3,20.75 48.158,20.75 48.658,20.25 v1(48.75,20.25)
  Int3 (Sign) w0.15: v1(24.247,30.786) 23.312,30.983 22.95,31.01 22.536,31.01 19.589,30.914 cw(c19.558,31.877) 19.517,30.914 17.302,31.01 17.181,31.01 17.137,30.966 16.421,30.25 8.402,30.25 8.315,30.162 8.315,26.148 8.75,25.712 v1(8.75,25.5) 9.053,25.5 9.417,25.864 9.614,25.864 9.66,25.91 12.824,25.91 12.872,25.862 12.911,25.827 14.12,24.853 cw(c13.517,24.102) 14.223,24.758 16.054,22.791 16.119,22.726 44.774,22.726 47.25,20.25 v1(48.75,20.25)
9V: C22_uf_2.1 C100nf.1 P3.4 R8_LED.2 U5.3 U9.1 U9.3 | length 68.2
  Top Layer w0.15: U9.3@43.391,33.325 44.525,33.325 C100nf.1@45.35,32.5 45.535,32.685 45.535,33.422 45.8,33.687 C22_uf_2.1@45.8,35 ; C22_uf_2.1@45.535,34.435 C22_uf_2.1@45.662,34.563